# Altium PCB Remote Rev B3.PcbDoc
Units mm, origin at the board's own origin, x right, y up, seen from the top; angles counter-clockwise.
Board outline 82 x 75.85 mm, 4 copper layers (SIG/PWR1, GND1, GND2, SIG/PWR2), stack 0.727 mm thick; 95 components, 39 nets, 247 pads, 48 vias.
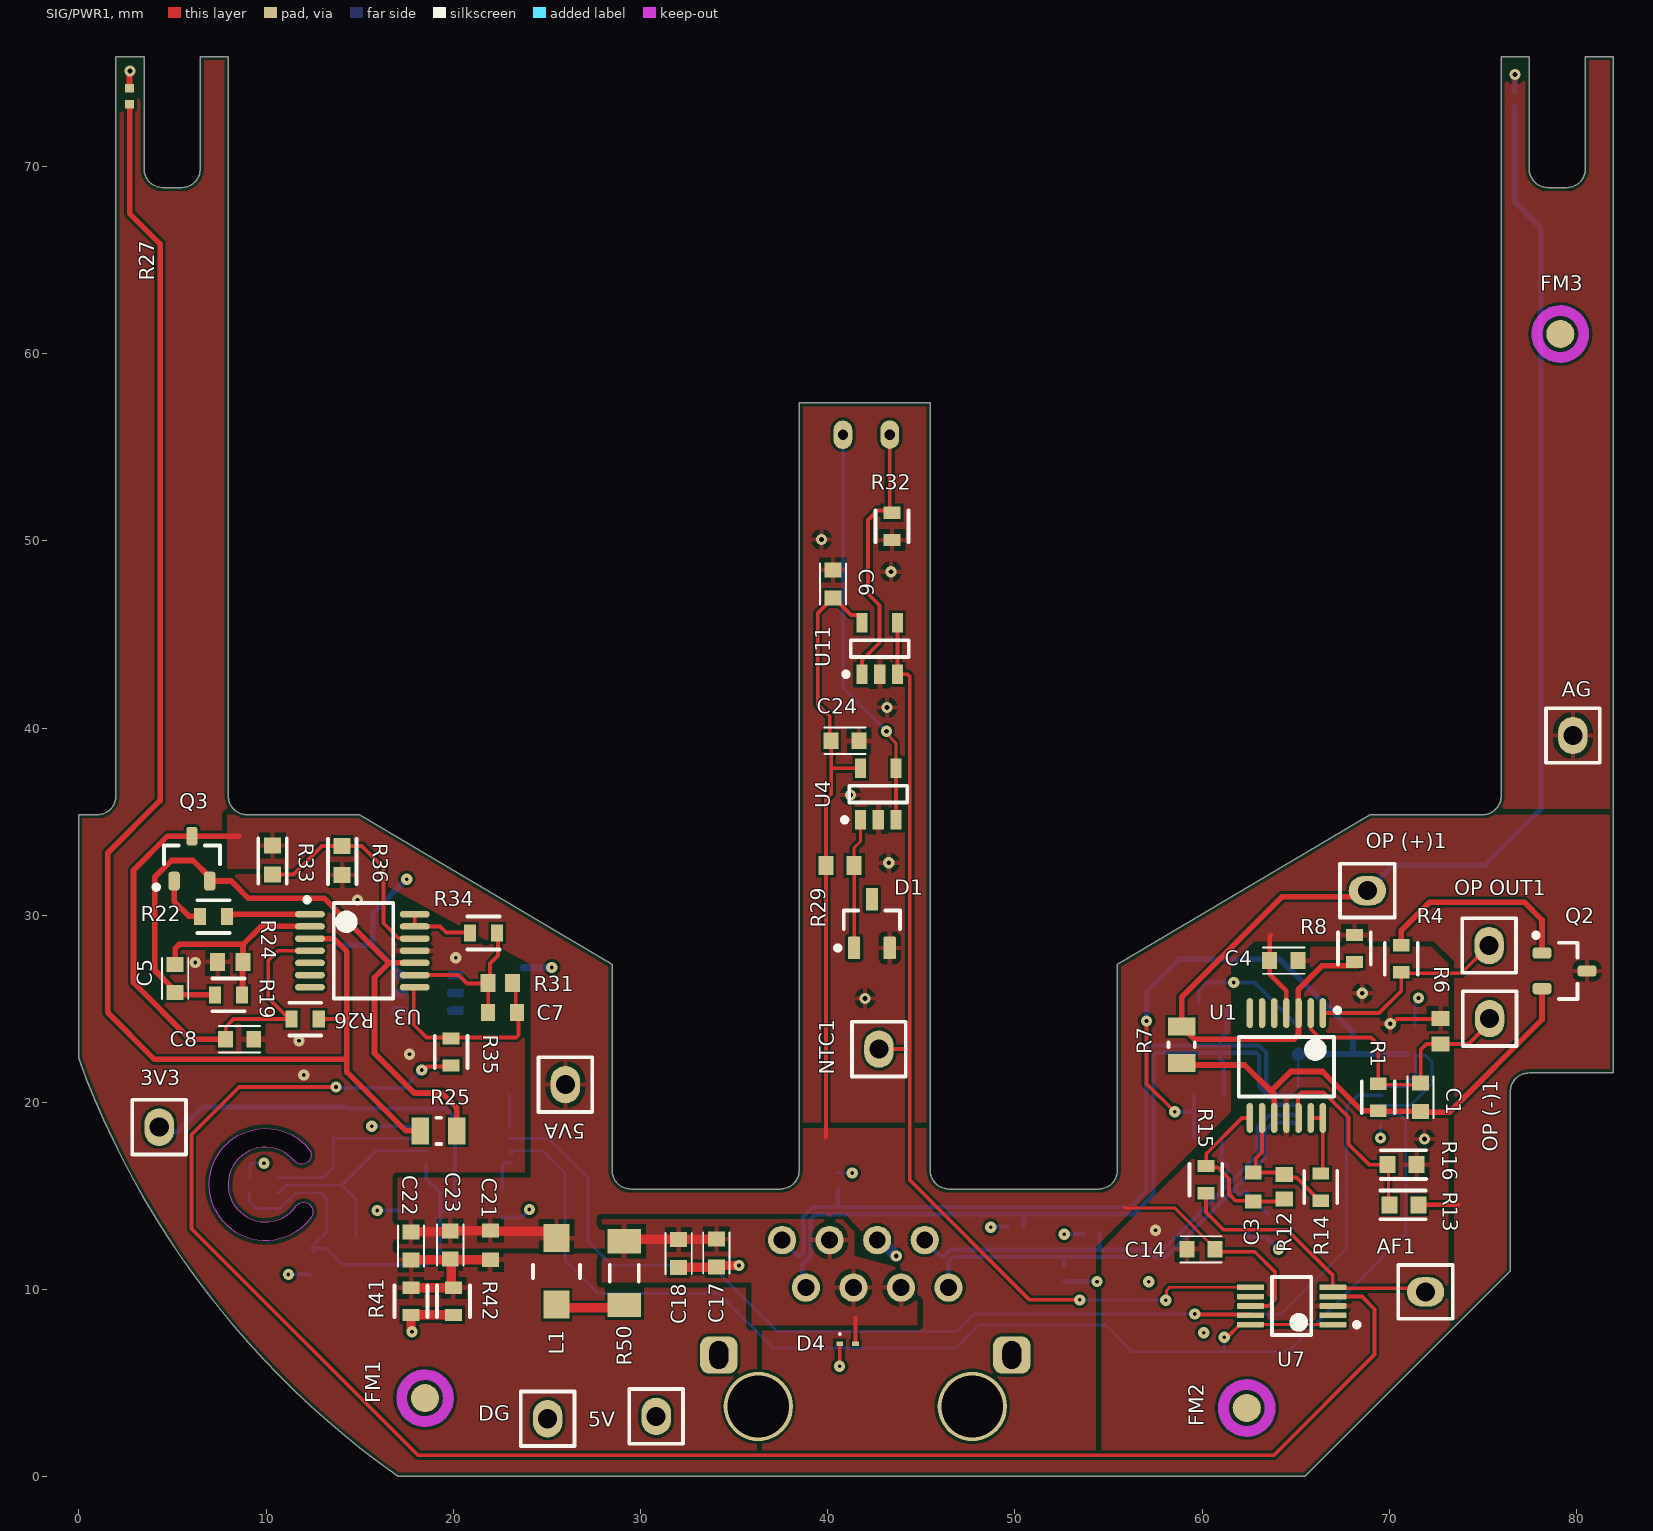
[diagram p0: SIG/PWR1 view]
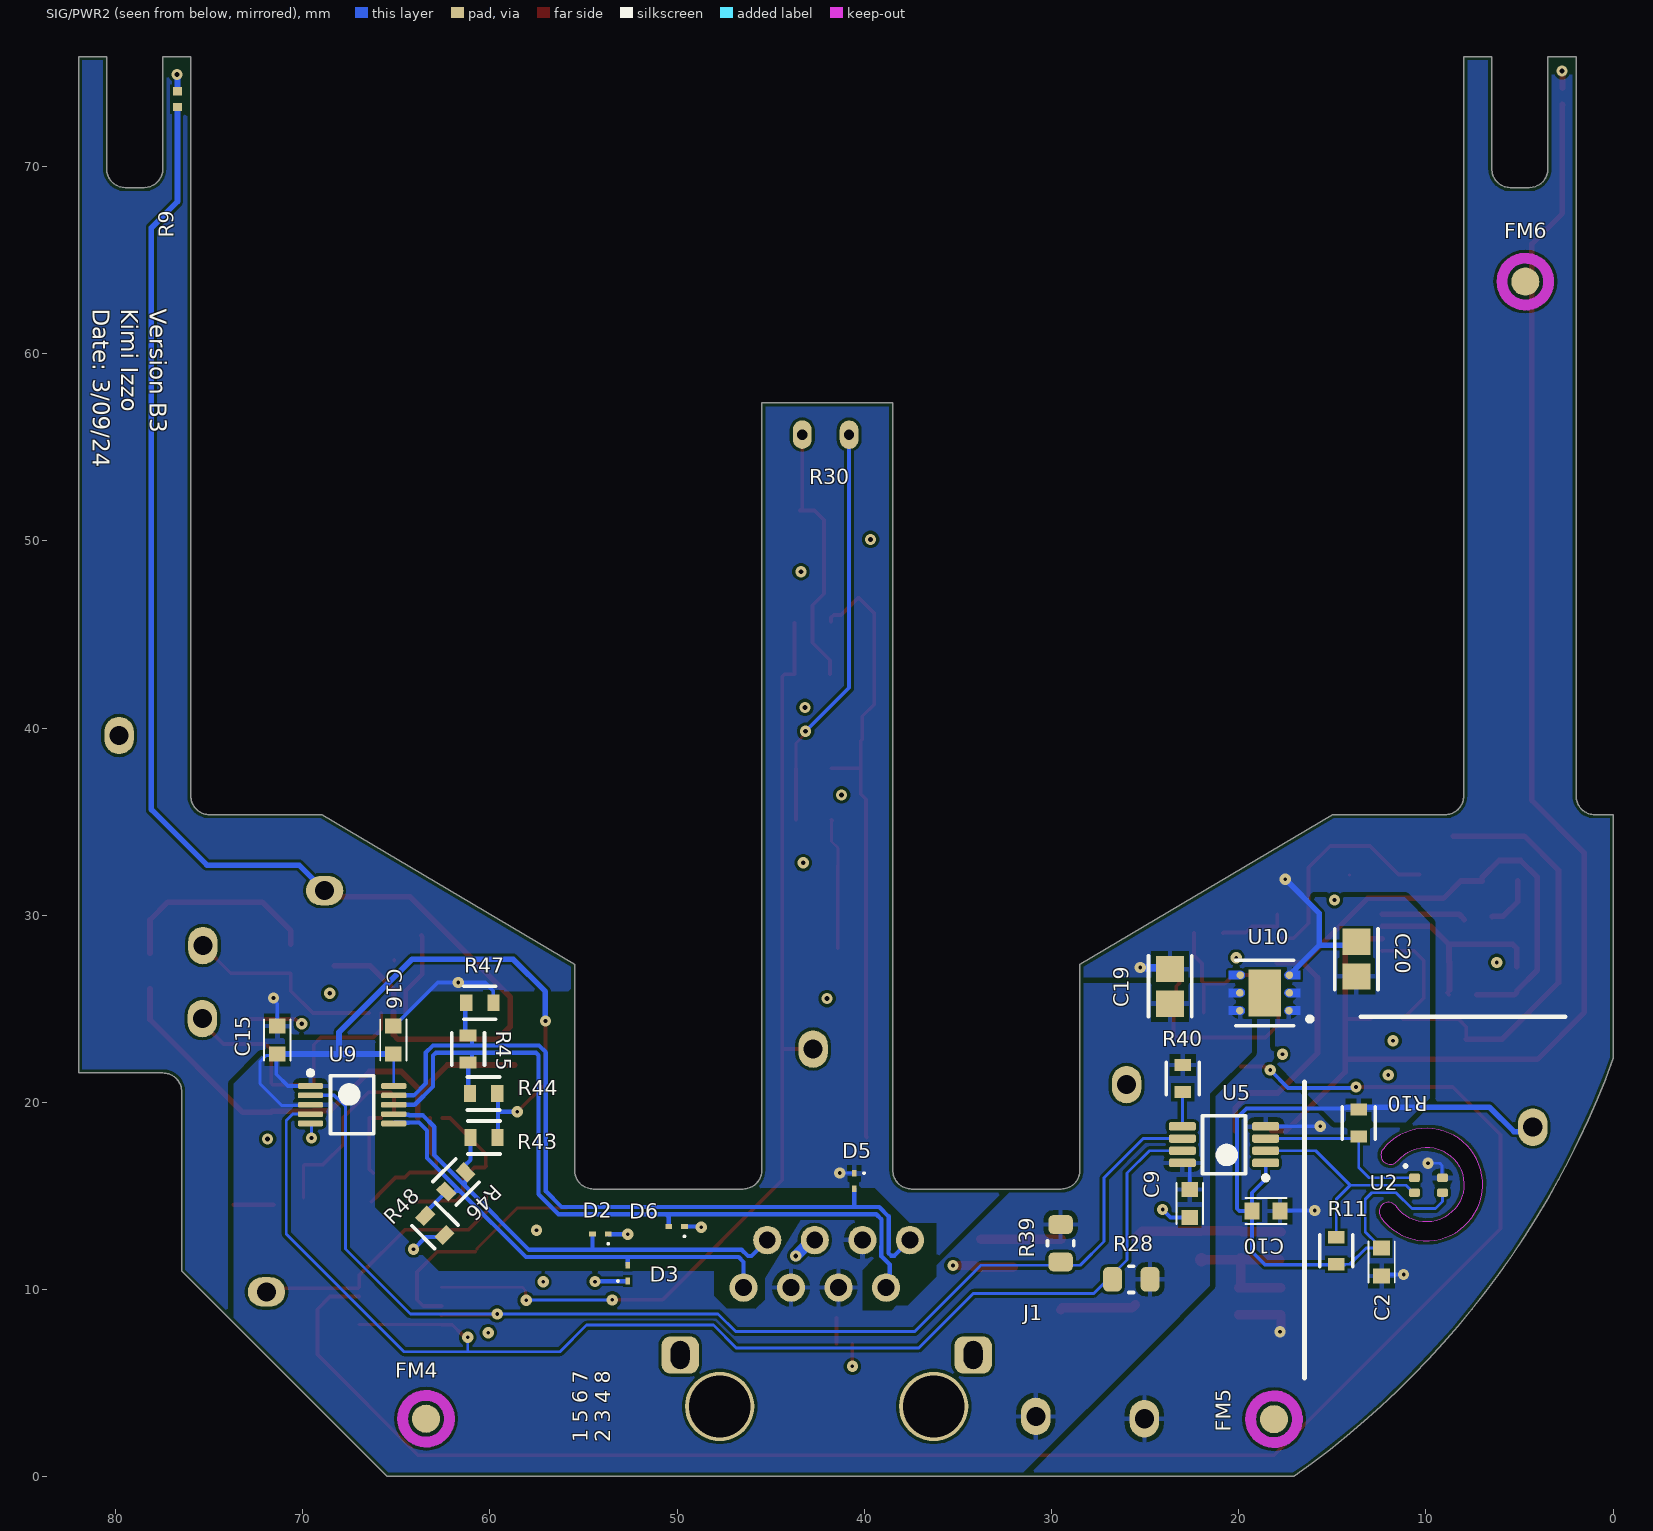
[diagram p1: SIG/PWR2 view, seen from below]
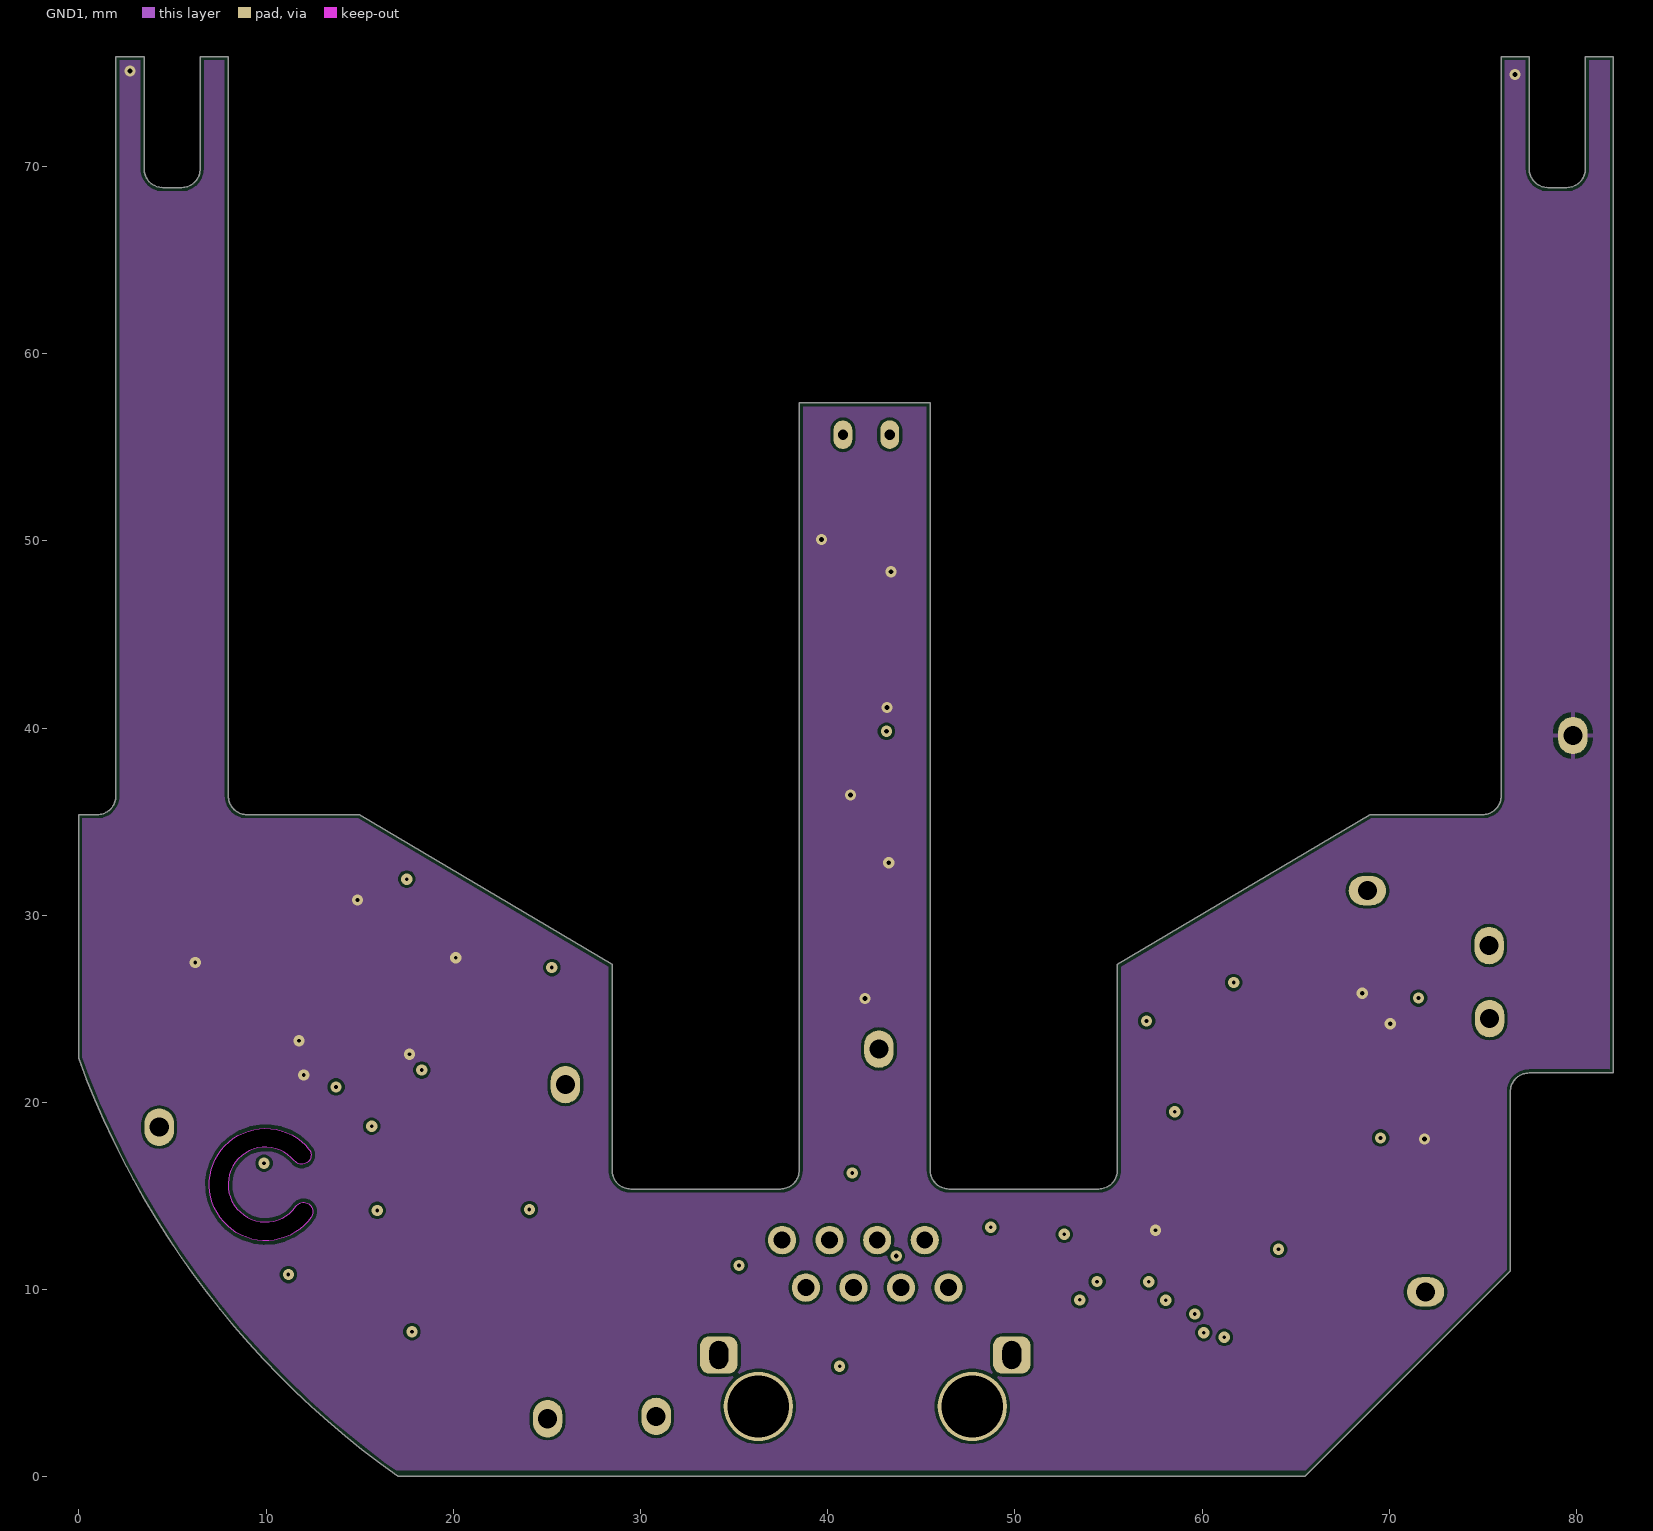
[diagram p2: GND1]
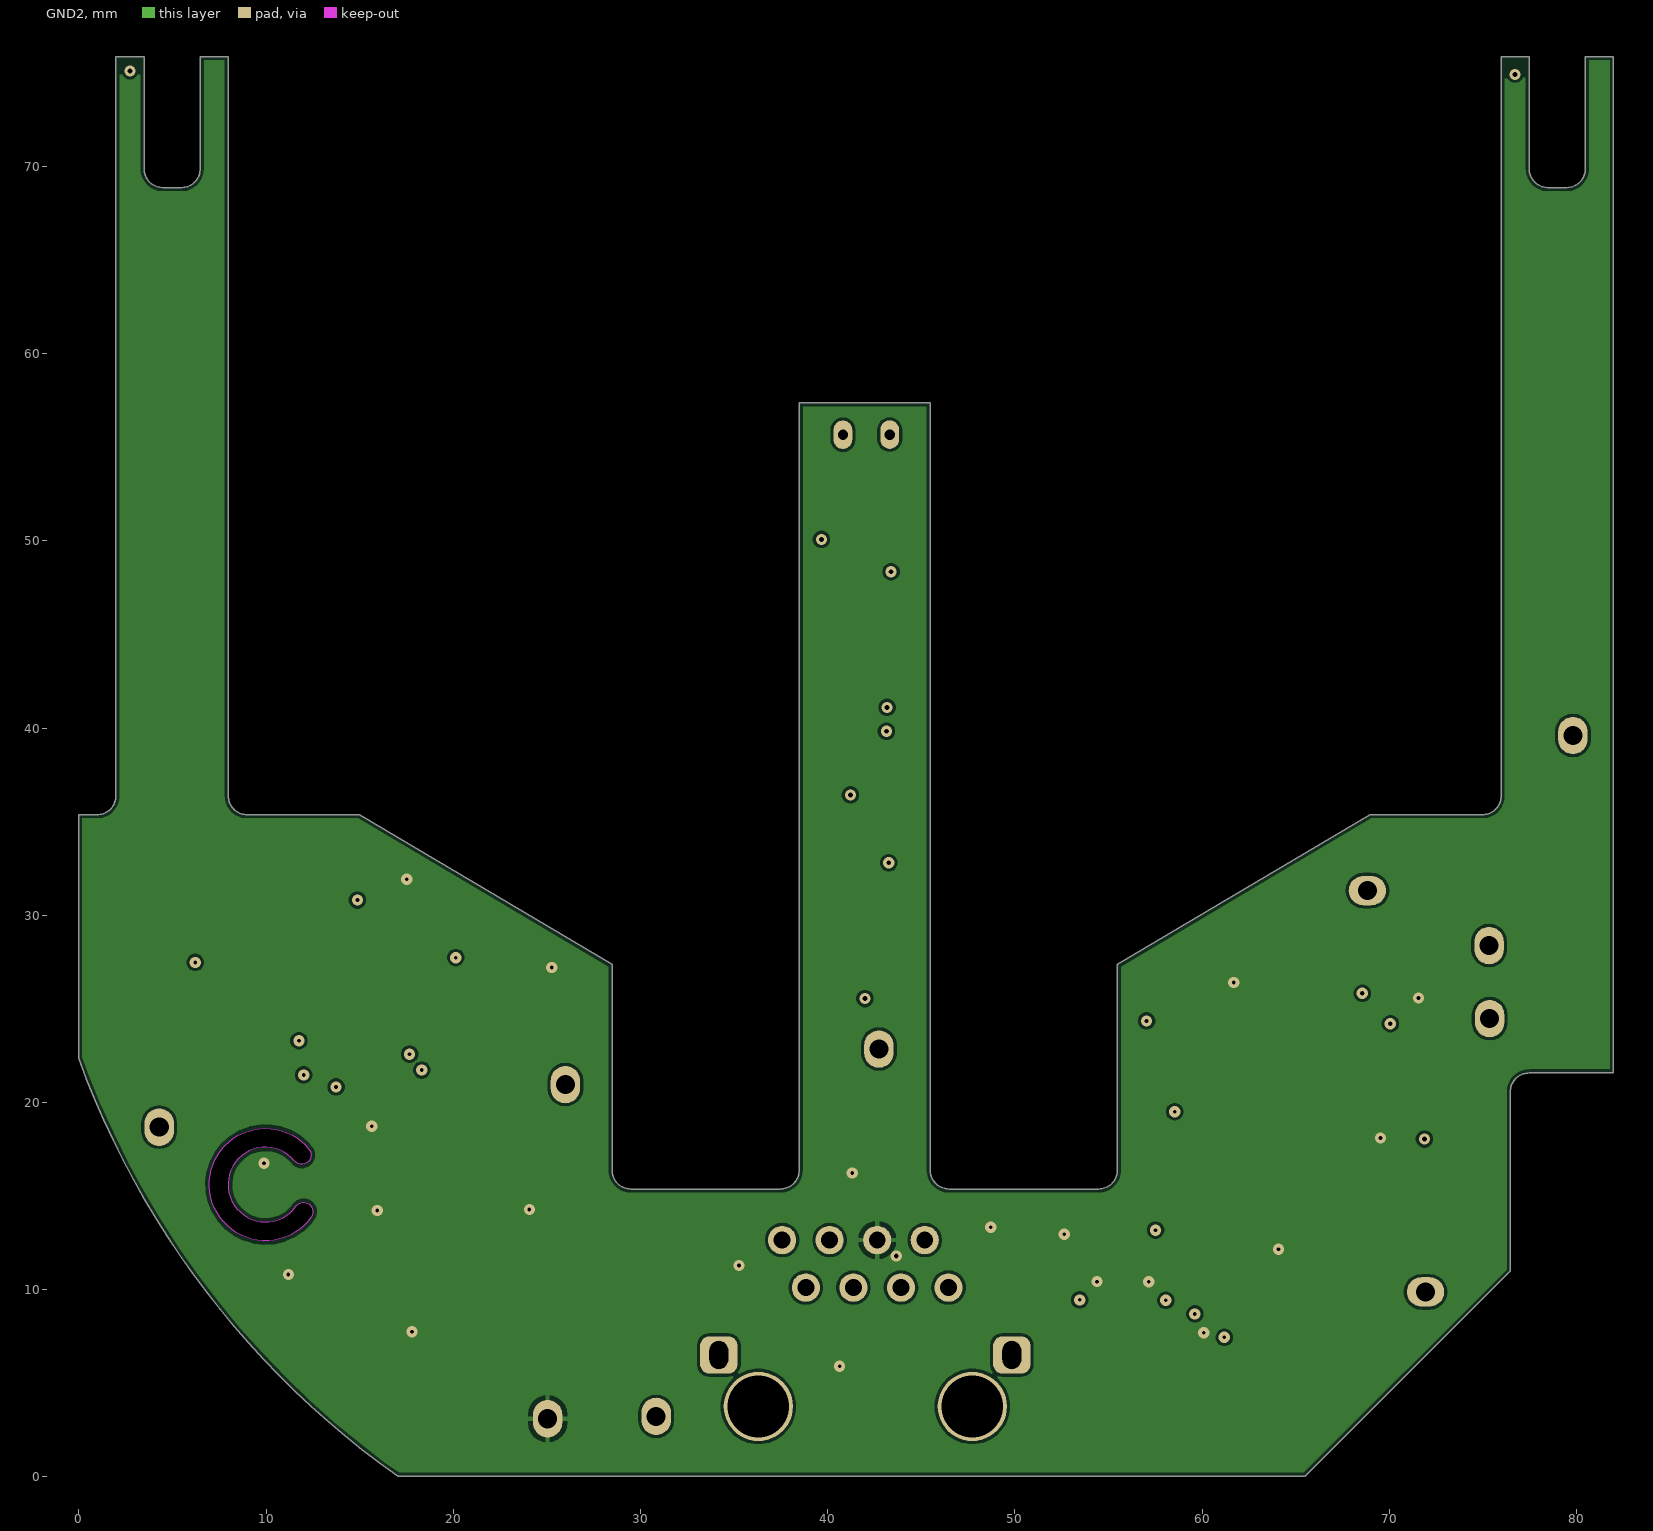
[diagram p3: GND2]
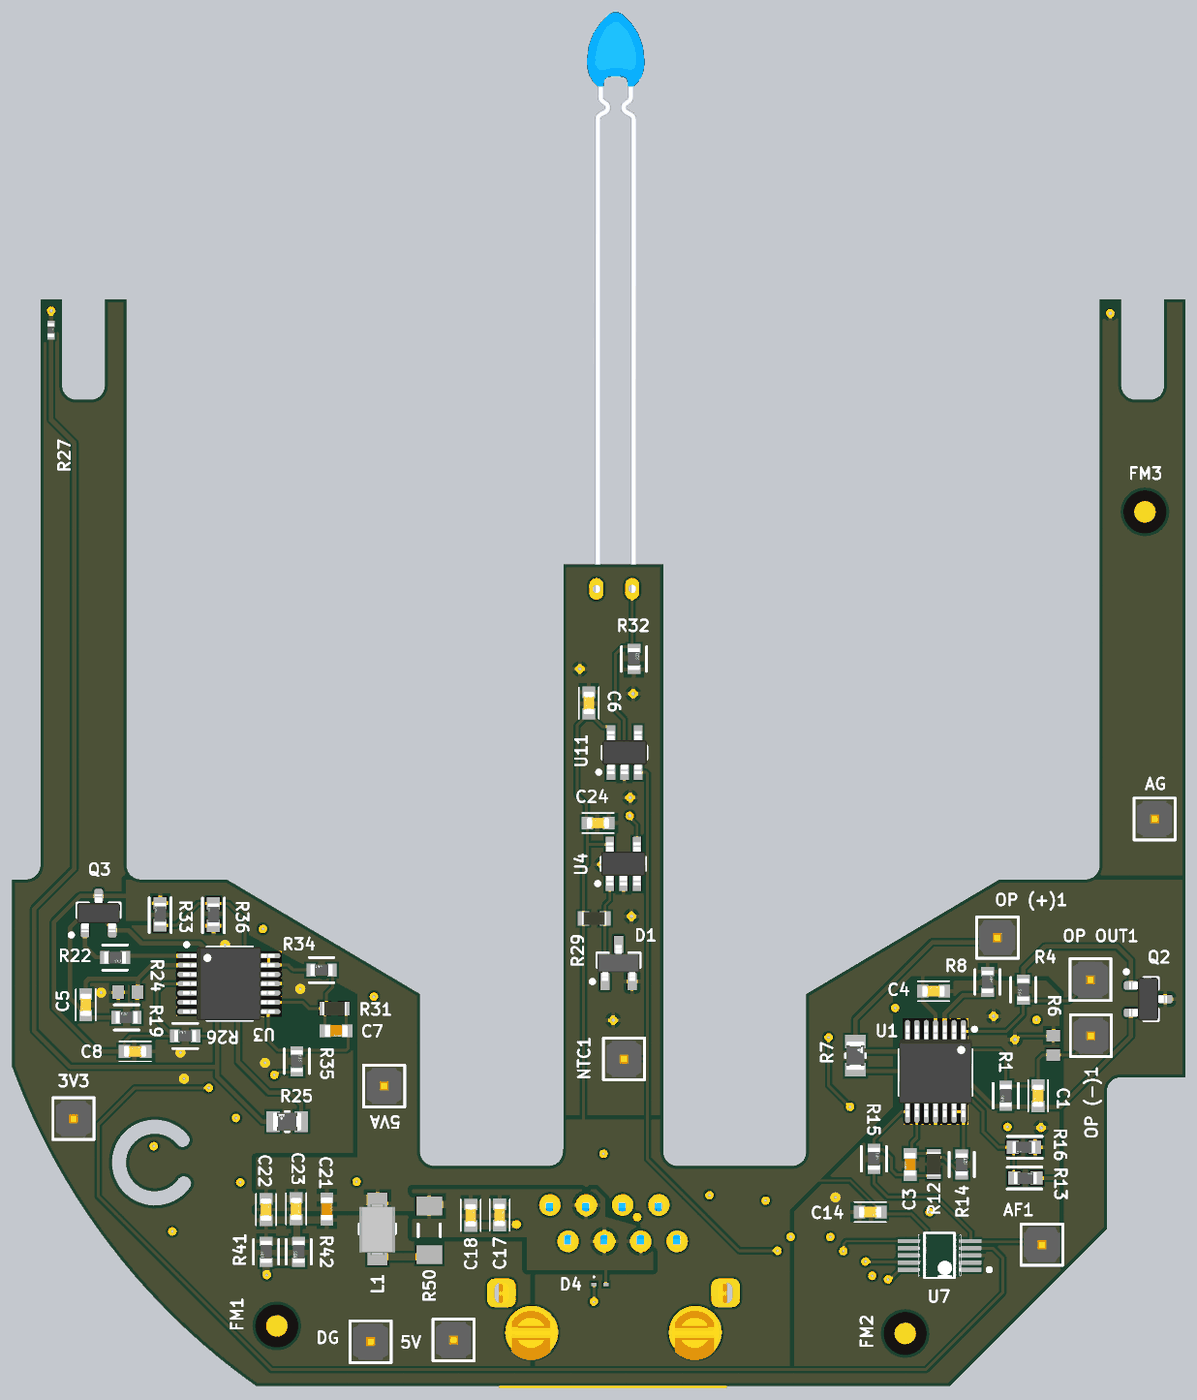
[diagram p4: 3D render of the assembled board from above, using the file's embedded part models]
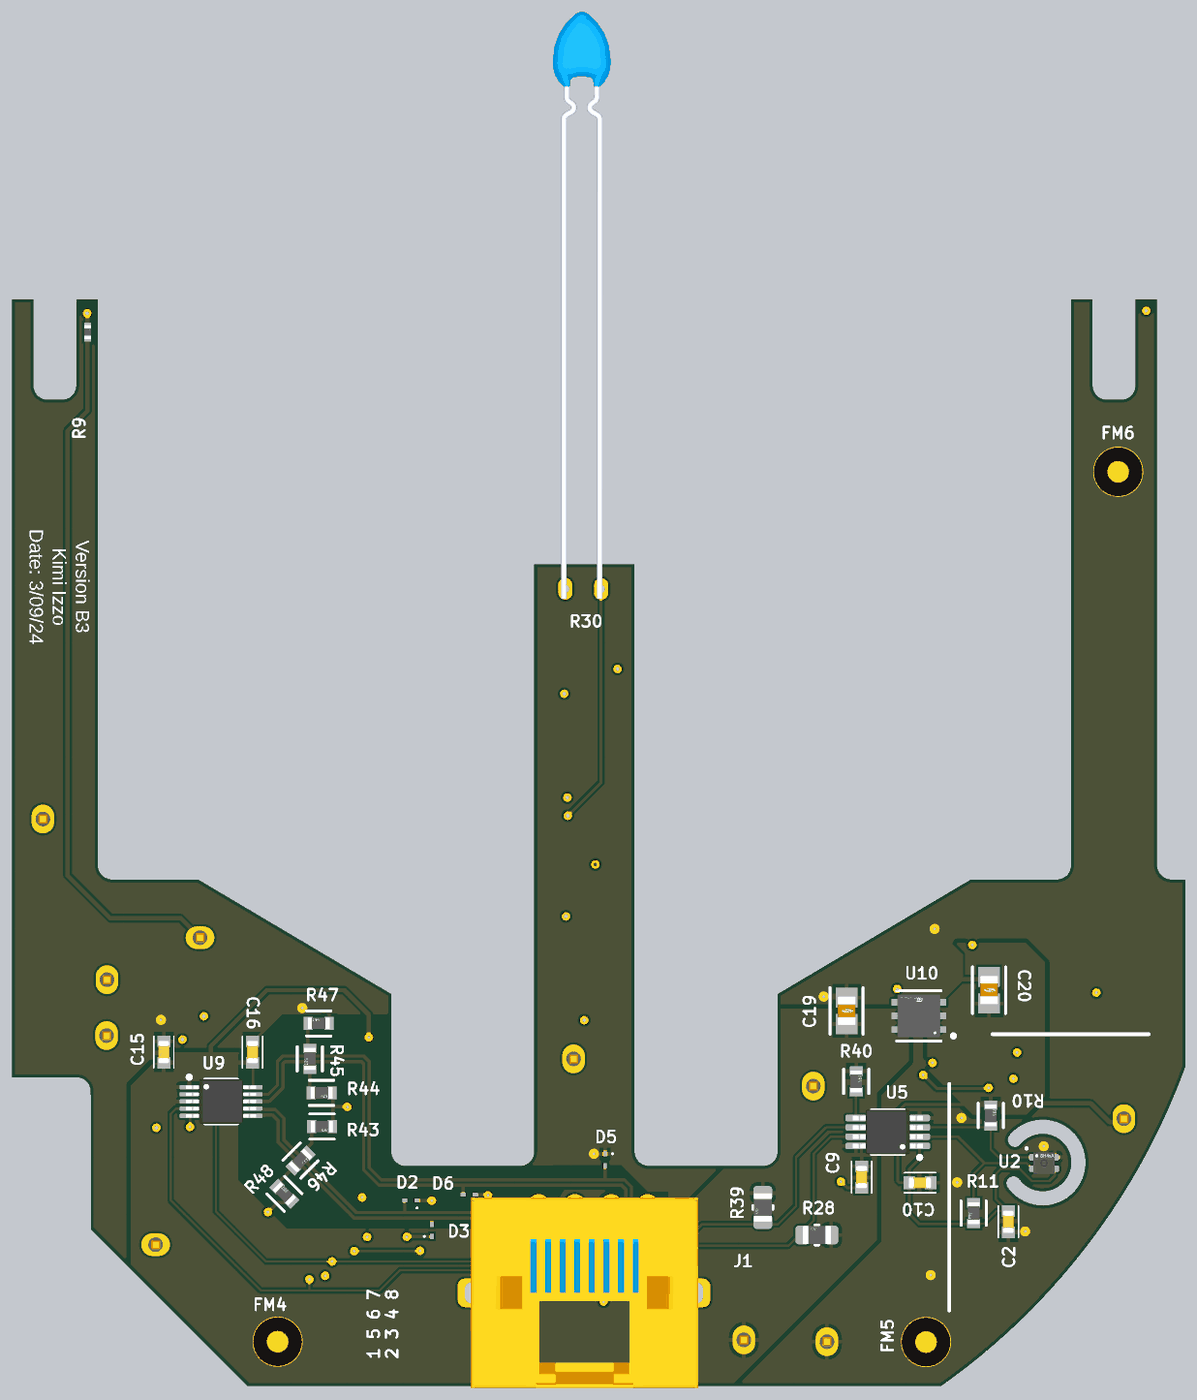
[diagram p5: 3D render of the assembled board from below, using the file's embedded part models]

## Layer stack, top to bottom
Top Solder: solder mask 0.0175, Solder Resist, Dk 3.5
SIG/PWR1: signal copper 0.0175
Dielectric 2: prepreg 0.196, PP-006, Dk 4.56
GND1: signal copper 0.035
Dielectric 1: dielectric 0.23, FR-4, Dk 4.6
GND2: signal copper 0.035
Dielectric 3: prepreg 0.196, PP-006, Dk 4.56
SIG/PWR2: signal copper 0.0175
Bottom Solder: solder mask 0.0175, Solder Resist, Dk 3.5

## Board outline
-0.024,22.379 ccw(c44.154,38.419) 17.036,0.032 65.504,0.032 76.466,10.994 76.466,20.579 cw(c77.466,20.579) 77.466,21.579 81.976,21.579 81.976,75.879 80.476,75.879 80.476,69.879 cw(c79.476,69.879) 79.476,68.879 78.476,68.879 cw(c78.476,69.879) 77.476,69.879 77.476,75.879 75.976,75.879 75.976,36.379 cw(c74.976,36.379) 74.976,35.379 68.976,35.379 55.476,27.379 55.476,16.379 cw(c54.476,16.379) 54.476,15.379 46.476,15.379 cw(c46.476,16.379) 45.476,16.379 45.476,57.379 38.476,57.379 38.476,16.379 cw(c37.476,16.379) 37.476,15.379 29.476,15.379 cw(c29.476,16.379) 28.476,16.379 28.476,27.379 14.976,35.379 8.976,35.379 cw(c8.976,36.379) 7.976,36.379 7.976,75.879 6.476,75.879 6.476,69.879 cw(c5.476,69.879) 5.476,68.879 4.476,68.879 cw(c4.476,69.879) 3.476,69.879 3.476,75.879 1.976,75.879 1.976,36.379 cw(c0.976,36.379) 0.976,35.379 -0.024,35.379
cut-out: 12.404,13.87 cw(c9.965,15.617) 12.288,17.516 cw(c11.901,17.2) 12.401,17.2 cw(c11.901,17.2) 11.513,16.883 ccw(c9.965,15.617) 11.591,14.453 cw(c11.997,14.162) 12.498,14.162 cw(c11.997,14.162)

## Design rules (kind name [scope] priority, off if disabled: settings)
BoardOutlineClearance [All] p1: gap=0.2 ignorepadtopadclearanceinfootprint=FALSE
Clearance [All] p1: gap=0.154 ignorepadtopadclearanceinfootprint=TRUE except(0.3: Poly-Poly)
ComponentClearance [All] p1: gap=0.102 collisioncheckmode=3 verticalgap=0.102 showdistances=TRUE
DiffPairsRouting "DiffPairsRouting sda" [InDifferentialPair('SDA')] p1: maxlimit=0.154 minlimit=0.127 mostfreqgap=0.16 toplayer_mingap=0.154 toplayer_minwidth=0.228 toplayer_maxwidth=0.228 toplayer_prefwidth=0.232 midlayer1_maxgap=0.127 midlayer1_prefgap=0.127 midlayer1_minwidth=0.064 midlayer1_maxwidth=0.064 midlayer1_prefwidth=0.059 midlayer2_maxgap=0.127 midlayer2_prefgap=0.127 midlayer2_minwidth=0.064 midlayer2_maxwidth=0.064 midlayer2_prefwidth=0.059 bottomlayer_mingap=0.154 bottomlayer_minwidth=0.228 bottomlayer_maxwidth=0.228 bottomlayer_prefwidth=0.232 impedanceprofiledriven=TRUE impedanceprofileid={54CBF0A0-3E90-4324-8A0D-8C87282BD158} impedanceprofilevalue=100.000000 maxuncoupledlength=12.7
DiffPairsRouting "DiffPairsRouting scl" [InDifferentialPair('SCL')] p2: maxlimit=0.154 minlimit=0.127 mostfreqgap=0.16 toplayer_mingap=0.154 toplayer_minwidth=0.228 toplayer_maxwidth=0.228 toplayer_prefwidth=0.232 midlayer1_maxgap=0.127 midlayer1_prefgap=0.127 midlayer1_minwidth=0.064 midlayer1_maxwidth=0.064 midlayer1_prefwidth=0.059 midlayer2_maxgap=0.127 midlayer2_prefgap=0.127 midlayer2_minwidth=0.064 midlayer2_maxwidth=0.064 midlayer2_prefwidth=0.059 bottomlayer_mingap=0.154 bottomlayer_minwidth=0.228 bottomlayer_maxwidth=0.228 bottomlayer_prefwidth=0.232 impedanceprofiledriven=TRUE impedanceprofileid={54CBF0A0-3E90-4324-8A0D-8C87282BD158} impedanceprofilevalue=100.000000 maxuncoupledlength=12.7
Height [All] p1: minheight=0 maxheight=1816.048 prefheight=12.7
HoleSize [All] p1: absolutevalues=TRUE maxlimit=6.3 minlimit=0.2 maxpercent=80.000 minpercent=20.000
HoleToHoleClearance [All] p1: gap=0.254 allowstackedmicrovias=FALSE
MinimumAnnularRing [All] p1: minimumring=0.152
MinimumSolderMaskSliver [All] p1: minsoldermaskwidth=0.152
PlaneClearance [All] p1: clearance=0.102
PlaneConnect PlaneConnectPowerPads [InPadClass('PowerPads')] p1: planeconnectstyle=Direct reliefexpansion=0.508 reliefentries=4 reliefconductorwidth=0.254 reliefairgap=0.254
PlaneConnect [All] p2: pad.planeconnectstyle=Relief pad.reliefexpansion=0.3 pad.reliefentries=4 pad.reliefconductorwidth=0.102 pad.reliefairgap=0.102 via.planeconnectstyle=Direct via.reliefexpansion=0.3 via.reliefentries=4 via.reliefconductorwidth=0.127 via.reliefairgap=0.127
PolygonConnect "dg polygon connect" [InNet('DGND')] p1: thpad.connectstyle=Relief thpad.reliefconductorwidth=0.254 thpad.reliefentries=4 thpad.polygonreliefangle="90 Angle" thpad.airgapwidth=0.254 smdpad.connectstyle=Relief smdpad.reliefconductorwidth=0.254 smdpad.reliefentries=4 smdpad.polygonreliefangle="90 Angle" smdpad.airgapwidth=0.254 via.connectstyle=Direct via.reliefconductorwidth=0.254 via.reliefentries=4 via.polygonreliefangle="90 Angle" via.airgapwidth=0.254
PolygonConnect "Ag polygon connect_1" [InNet('AGND')] p2: thpad.connectstyle=Relief thpad.reliefconductorwidth=0.254 thpad.reliefentries=4 thpad.polygonreliefangle="90 Angle" thpad.airgapwidth=0.254 smdpad.connectstyle=Relief smdpad.reliefconductorwidth=0.254 smdpad.reliefentries=4 smdpad.polygonreliefangle="90 Angle" smdpad.airgapwidth=0.254 via.connectstyle=Direct via.reliefconductorwidth=0.254 via.reliefentries=4 via.polygonreliefangle="90 Angle" via.airgapwidth=0.254
PolygonConnect "A5V polygon connect_1" [InNet('+5V_ANLG')] p3: thpad.connectstyle=Relief thpad.reliefconductorwidth=0.254 thpad.reliefentries=4 thpad.polygonreliefangle="90 Angle" thpad.airgapwidth=0.254 smdpad.connectstyle=Relief smdpad.reliefconductorwidth=0.254 smdpad.reliefentries=4 smdpad.polygonreliefangle="90 Angle" smdpad.airgapwidth=0.254 via.connectstyle=Direct via.reliefconductorwidth=0.254 via.reliefentries=4 via.polygonreliefangle="90 Angle" via.airgapwidth=0.254
PolygonConnect "3V polygon connect_1" [InNet('+3V3')] p4: thpad.connectstyle=Relief thpad.reliefconductorwidth=0.254 thpad.reliefentries=4 thpad.polygonreliefangle="90 Angle" thpad.airgapwidth=0.254 smdpad.connectstyle=Relief smdpad.reliefconductorwidth=0.254 smdpad.reliefentries=4 smdpad.polygonreliefangle="90 Angle" smdpad.airgapwidth=0.254 via.connectstyle=Direct via.reliefconductorwidth=0.254 via.reliefentries=4 via.polygonreliefangle="90 Angle" via.airgapwidth=0.254
PolygonConnect "5V polygon connect_1" [InNet('+5V')] p5: thpad.connectstyle=Relief thpad.reliefconductorwidth=0.254 thpad.reliefentries=4 thpad.polygonreliefangle="90 Angle" thpad.airgapwidth=0.254 smdpad.connectstyle=Relief smdpad.reliefconductorwidth=0.254 smdpad.reliefentries=4 smdpad.polygonreliefangle="90 Angle" smdpad.airgapwidth=0.254 via.connectstyle=Direct via.reliefconductorwidth=0.254 via.reliefentries=4 via.polygonreliefangle="90 Angle" via.airgapwidth=0.254
RoutingVias [All] p1: holewidth=0.2 width=0.6 viastyle="Through Hole" minholewidth=0.2 minwidth=0.6 maxholewidth=6.3 maxwidth=6.55
SilkToSilkClearance [All] p1: silktosilkclearance=0.127
SilkToSolderMaskClearance [IsPad] p1: minsilkscreentomaskgap=0.127 clearancetoexposedcopper=TRUE
SolderMaskExpansion [All] p1: expansion=0.051 istentingtop=FALSE
UnRoutedNet [All] p1: checkbadconnections=TRUE
Width Width_6mil [All] p1: maxlimit=0.7 minlimit=0.153 preferedwidth=0.2
Width Power_20mil [All] p2: maxlimit=25.4 minlimit=0.508 preferedwidth=0.508 minimp=50.000000 maximp=50.000000 favimp=50.000000
Width Power_12mil [All] p3: maxlimit=25.4 minlimit=0.305 preferedwidth=0.305 minimp=50.000000 maximp=50.000000 favimp=50.000000
Width Width_10mil [All] p4: maxlimit=25.4 minlimit=0.254 preferedwidth=0.254 minimp=50.000000 maximp=50.000000 favimp=50.000000
Width Width_4mil [All] p5: maxlimit=25.4 minlimit=0.102 preferedwidth=0.102 minimp=50.000000 maximp=50.000000 favimp=50.000000
19 further rules are at their usual default settings.

## Classes and differential pairs
component class Airspeed1_B3: AF1 C1 C2 C3 C4 "OP (+)1" "OP (-)1" "OP OUT1" Q2 R1 R4 R6 R7 R8 R9 R10 R11 R12 R13 R14 R15 R16 U1 U2
component class "Bus Management_B3": 3V3 5V 5VA AG C9 C10 C14 C15 C16 C17 C18 C19 C20 C21 C22 C23 D2 D3 D4 D5 D6 DG FM1 FM2 FM3 FM4 FM5 FM6 J1 L1 R28 R39 R40 R41 R42 R43 R44 R45 R46 R47 R48 R50 R51 U5 U7 U9 U10
component class Airspeed2_B3: C5 C6 C7 C8 C24 D1 NTC1 Q3 R19 R22 R24 R25 R26 R27 R29 R30 R31 R32 R33 R34 R35 R36 U3 U4 U11
differential pair SDA: +SDA_P -SDA_N
differential pair SCL: +SCL_P -SCL_N

## Components (designator, comment, footprint, x,y, rotation, side; value= is the part's Value field where it differs from the comment)
3V3 "PH1-01-UA" FP-PH1-01-UA-MFG 4.286,18.682 r90 top
5V "PH1-01-UA" FP-PH1-01-UA-MFG 30.836,3.232 r90 top
5VA "PH1-01-UA" FP-PH1-01-UA-MFG 25.986,20.957 r270 top
AF1 "PH1-01-UA" FP-PH1-01-UA-MFG 71.936,9.882 r0 top
AG "PH1-01-UA" FP-PH1-01-UA-MFG 79.811,39.607 r90 top
C1 "CL10B105KA8NFNC" MANUF_CAP_0603 71.667,20.282 r270 top value=1µF
C2 "CC0603KRX7R7BB104" MANUF_CAP_0603 12.361,11.482 r90 bottom value=100nF
C3 "GRM188R61A106ME69D" FP-GRM188-0_15-MFG 62.736,15.482 r270 top value=10µF
C4 "CC0603KRX7R7BB104" MANUF_CAP_0603 64.361,27.582 r180 top value=100nF
C5 "CL10B105KA8NFNC" MANUF_CAP_0603 5.136,26.632 r270 top value=1µF
C6 "CC0603KRX7R7BB104" MANUF_CAP_0603 40.286,47.707 r270 top value=100nF
C7 "GRM188R61A106ME69D" FP-GRM188-0_15-MFG 22.636,24.807 r0 top value=10µF
C8 "CC0603KRX7R7BB104" MANUF_CAP_0603 8.586,23.382 r180 top value=100nF
C9 "CC0603KRX7R7BB104" MANUF_CAP_0603 22.611,14.607 r90 bottom value=100nF
C10 "CC0603KRX7R7BB104" MANUF_CAP_0603 18.536,14.207 r0 bottom value=100nF
C14 "CC0603KRX7R7BB104" MANUF_CAP_0603 59.94,12.159 r0 top value=100nF
C15 "CC0603KRX7R7BB104" MANUF_CAP_0603 71.361,23.332 r270 bottom value=100nF
C16 "CC0603KRX7R7BB104" MANUF_CAP_0603 65.161,23.332 r270 bottom value=100nF
C17 "CL10B105KA8NFNC" MANUF_CAP_0603 34.051,11.953 r90 top value=1µF
C18 "CC0603KRX7R7BB104" MANUF_CAP_0603 32.036,11.932 r90 top value=100nF
C19 "CL21B106KOQNNNE" FP-CL21B106KOQNNNE-IPC_A 23.661,26.207 r270 bottom value=10µF
C20 "CL21B106KOQNNNE" FP-CL21B106KOQNNNE-IPC_A 13.711,27.655 r270 bottom value=10µF
C21 "GRM188R61A106ME69D" FP-GRM188-0_15-MFG 21.977,12.376 r90 top value=10µF
C22 "CL10B105KA8NFNC" MANUF_CAP_0603 17.733,12.332 r90 top value=1µF
C23 "CC0603KRX7R7BB104" MANUF_CAP_0603 19.836,12.382 r90 top value=100nF
C24 "CC0603KRX7R7BB104" MANUF_CAP_0603 40.927,39.326 r180 top value=100nF
D1 "LM4040C41IDBZR" DBZ0003A_M 42.361,29.557 r90 top
D2 "ESD9B5.0ST5G" ONSC-SOD-923-2-514AB-01_V 54.102,12.976 r0 bottom
D3 "ESD9B5.0ST5G" ONSC-SOD-923-2-514AB-01_V 52.636,10.882 r90 bottom
D4 "ESD9B5.0ST5G" ONSC-SOD-923-2-514AB-01_V 41.061,7.107 r0 top
D5 "ESD9B5.0ST5G" ONSC-SOD-923-2-514AB-01_V 40.536,15.807 r270 bottom
D6 "ESD9B5.0ST5G" ONSC-SOD-923-2-514AB-01_V 50.027,13.376 r0 bottom
DG "PH1-01-UA" FP-PH1-01-UA-MFG 25.036,3.107 r270 top
FM1 "fiducial 1mm" "fiducial 1mm-Footprint-1"#1 18.486,4.207 r0 top
FM2 "fiducial 1mm" "fiducial 1mm-Footprint-1"#1 62.386,3.682 r0 top
FM3 "fiducial 1mm" "fiducial 1mm-Footprint-1"#1 79.136,61.057 r0 top
FM4 "fiducial 1mm" "fiducial 1mm-Footprint-1"#2 63.411,3.107 r180 bottom
FM5 "fiducial 1mm" "fiducial 1mm-Footprint-1"#2 18.111,3.082 r180 bottom
FM6 "fiducial 1mm" "fiducial 1mm-Footprint-1"#2 4.686,63.857 r180 bottom
J1 "09455511103" 09455511103-Footprint-1 45.183,12.653 r180 bottom locked
L1 "CC322522A-2R2K" INDC3225X06N 25.511,10.982 r90 top value=2.2uH
NTC1 "PH1-01-UA" FP-PH1-01-UA-MFG 42.736,22.857 r90 top
"OP (+)1" "PH1-01-UA" FP-PH1-01-UA-MFG 68.833,31.32 r0 top
"OP (-)1" "PH1-01-UA" FP-PH1-01-UA-MFG 75.361,24.482 r90 top
"OP OUT1" "PH1-01-UA" FP-PH1-01-UA-MFG 75.331,28.387 r90 top
Q2 "FMMT493TA" SOT95P237X110-3N 79.361,27.032 r0 top
Q3 "FMMT493TA" SOT95P237X110-3N 6.036,33.032 r90 top
R1 "ERJ-3EKF2001V" MANUF_RES_0603 69.411,20.282 r270 top value=2k
R4 "ERJ-3EKF2001V" MANUF_RES_0603 70.636,27.68 r270 top value=2k
R6 "ERJ-3EKF1653V" RESC1608X55X30NL15T15 72.736,23.807 r270 top value=165k
R7 "CRCW08051R00FKEAHP" Vishay_CRCW0805-HPe3_MFG 58.911,23.082 r270 top value=1R
R8 "RC0603FR-0710KL" MANUF_RES_0603 68.136,28.232 r90 top value=10k
R9 "NTCG103NH471JT1" NTCG103NH471JT1-Footprint-1 76.686,73.607 r90 bottom value=470
R10 "RC0603FR-0710KL" MANUF_RES_0603 13.586,18.907 r90 bottom value=10k
R11 "RC0603FR-0710KL" MANUF_RES_0603 14.786,12.082 r270 bottom value=10k
R12 "CRCW06033K60FKEAC" RESC1609X50X30NL08T20 64.386,15.507 r270 top value=3.6k
R13 "AC0603FR-0775KL" "IPC B 0603 RES" 70.786,14.532 r0 top value=75k
R14 "ERJ-3EKF2001V" MANUF_RES_0603 66.336,15.482 r90 top value=2k
R15 "ERJ-3EKF2001V" MANUF_RES_0603 60.202,15.876 r90 top value=2k
R16 "RC0603FR-07280KL" "IPC B 0603 RES" 70.686,16.682 r180 top value=280k
R19 "ERJ-3EKF2001V" MANUF_RES_0603 7.99,25.75 r180 top value=2k
R22 "ERJ-3EKF2001V" MANUF_RES_0603 7.186,29.932 r0 top value=2k
R24 "ERJ-3EKF1653V" RESC1608X55X30NL15T15 8.086,27.507 r0 top value=165k
R25 "CRCW08051R00FKEAHP" Vishay_CRCW0805-HPe3_MFG 19.211,18.482 r0 top value=1R
R26 "RC0603FR-0710KL" MANUF_RES_0603 12.086,24.457 r180 top value=10k
R27 "NTCG103NH471JT1" NTCG103NH471JT1-Footprint-1 2.702,73.751 r90 top value=470
R28 "RC0805JR-075K1L" 0805 25.736,10.557 r180 bottom value=5.1k
R29 "Resistor 1k +/-1% 0603 100 mW" RESC1608X55X25ML10T15 40.661,32.657 r180 top value=1k
R30 "TT7-10KC3-11" TT7-10KC3-11-Footprint-1 42.061,55.682 r180 bottom value=10k
R31 "CRCW06033K60FKEAC" RESC1609X50X30NL08T20 22.511,26.382 r0 top value=3.6k
R32 "RC0603FR-0710KL" MANUF_RES_0603 43.436,50.782 r90 top value=10k
R33 "AC0603FR-0775KL" "IPC B 0603 RES" 10.336,32.958 r90 top value=75k
R34 "ERJ-3EKF2001V" MANUF_RES_0603 21.611,29.057 r180 top value=2k
R35 "ERJ-3EKF2001V" MANUF_RES_0603 19.88,22.697 r90 top value=2k
R36 "RC0603FR-07280KL" "IPC B 0603 RES" 14.061,32.932 r90 top value=280k
R39 "RC0805JR-075K1L" 0805 29.511,12.482 r90 bottom value=5.1k
R40 "RC0603FR-0710KL" MANUF_RES_0603 22.986,21.282 r90 bottom value=10k
R41 "Resistor 0R +/- 5% 0603 100 mW" MANUF_RES_0603 17.736,9.382 r270 top value=0
R42 "Resistor 0R +/- 5% 0603 100 mW" MANUF_RES_0603 20.011,9.382 r270 top value=0
R43 "ERJ-3EKF5900V" MANUF_RES_0603 60.311,18.132 r180 bottom value=590
R44 "ERJ-3EKF5900V" MANUF_RES_0603 60.336,20.482 r180 bottom value=590
R45 "RMCF0603FT110R" MANUF_RES_0603 61.161,22.857 r270 bottom value=110
R46 "RMCF0603FT110R" MANUF_RES_0603 61.811,15.757 r135 bottom value=110
R47 "ERJ-3EKF5900V" MANUF_RES_0603 60.536,25.332 r0 bottom value=590
R48 "ERJ-3EKF5900V" MANUF_RES_0603 62.936,13.432 r45 bottom value=590
R50 "CRM1206-FX-R910ELF" RESC3116X06N 29.136,10.882 r270 top value="0.91 R"
U1 "TL974IPW" TSOP65P640X120-14N 64.502,21.976 r270 top
U2 "SHT41A-AD1B-R3" SHT41A-AD1B-R3-Footprint-1 10.087,15.583 r180 bottom
U3 "TL974IPW" TSOP65P640X120-14N 15.136,28.107 r0 top
U4 "LMV321WG-7" SOT95P285X130-5N 42.702,36.476 r90 top
U5 "TCA9509DGKR" TSOP65P490X110-8N 20.782,17.75 r0 bottom
U7 "ADS1115IDGSR" FP-DGS0010A-MFG 64.786,9.132 r180 top
U9 "PCA9615DPZ" TSSOP50P490X110-10N 67.361,19.882 r180 bottom
U10 "LD39200PU33R" FP-DFN6-7946637-MFG 18.611,25.857 r0 bottom
U11 "LMV321WG-7" SOT95P285X130-5N 42.777,44.251 r90 top

## Footprints (in the part's own frame and the unit in brackets; to place one, negate y for a bottom-side part, rotate by r counter-clockwise, add the part's x,y. Pads: shape width x height; smd on the part's side, far side on the other; paste and mask are expansions set on the pad)
0805 [mm]
  rrect50% 1x1.3 smd paste+0 mask+0: 1(-1,0) 2(1,0)
  silkscreen extent -0.12,-0.7 0.13,0.7, body extent -1,-0.63 1,0.63, height 0.65
09455511103-Footprint-1 [mm]
  rrect50% 2x2 hole 1 slot 1.5 at 90 deg: 0(-4.65,-6.14) 0(11,-6.14)
  round 3.7 hole 3.3: 0(-2.54,-8.89) 0(8.89,-8.89)
  oval 1.5x1.524 hole 0.9: 1(0,0) 2(-1.27,-2.54) 3(1.27,-2.54) 4(3.81,-2.54) 5(2.54,0) 6(5.08,0) 7(7.62,0) 8(6.35,-2.54)
  body extent -4.73,-12.78 11.17,0.52, height 16.35
DBZ0003A_M [mm] "SOT23, 3-Leads, Body 3.04x1.4mm, Pitch 0.95mm, IPC Low Density"
  rrect15% 1.2x0.65 smd: 1(-1.3,0.95) 2(-1.3,-0.95) 3(1.3,0)
  silkscreen extent -1.42,-1.5 0.7,1.95, body extent -1.26,-1.46 1.26,1.46, height 0.96
"fiducial 1mm-Footprint-1"#1 [mm]
  round 1.5 smd paste-1 mask+0.75: 0(0,0)
  SIG/PWR1 keep-out circle w0.58: c0,0 r1.25
"fiducial 1mm-Footprint-1"#2 [mm]
  round 1.5 smd paste-1 mask+1: 0(0,0)
  SIG/PWR1 keep-out circle w0.58: c0,0 r1.25
FP-CL21B106KOQNNNE-IPC_A [mm]
  rect 1.406x1.508 smd paste+0 mask+0: 1(-0.926,0) 2(0.926,0)
  silkscreen extent -1.63,-1.15 1.63,1.15, body extent -1.01,-0.62 0.99,0.63, height 1.4
FP-DFN6-7946637-MFG [mm]
  round 0.405 smd paste+0 mask+0: 1(-1.3,0.95) 2(-1.321,0) 3(-1.321,-0.95) 4(1.3,-0.95) 5(1.321,0) 6(1.321,0.95)
  rect 1.75x2.5 smd paste+0 mask+0: 7(0,0)
  SIG/PWR1 region: -1.905,1.175 -1.275,1.175 -1.189,1.158 -1.116,1.109 -1.067,1.036 -1.05,0.95 -1.05,0.95 -1.067,0.864 -1.116,0.791 -1.189,0.742 -1.275,0.725 -1.275,0.725 -1.905,0.725
  SIG/PWR1 region: -1.905,0.225 -1.275,0.225 -1.189,0.208 -1.116,0.159 -1.067,0.086 -1.05,0 -1.05,0 -1.067,-0.086 -1.116,-0.159 -1.189,-0.208 -1.275,-0.225 -1.275,-0.225 -1.905,-0.225
  SIG/PWR1 region: -1.905,-0.725 -1.275,-0.725 -1.189,-0.742 -1.116,-0.791 -1.067,-0.864 -1.05,-0.95 -1.05,-0.95 -1.067,-1.036 -1.116,-1.109 -1.189,-1.158 -1.275,-1.175 -1.275,-1.175 -1.905,-1.175
  SIG/PWR1 region: 1.905,-1.175 1.275,-1.175 1.189,-1.158 1.116,-1.109 1.067,-1.036 1.05,-0.95 1.05,-0.95 1.067,-0.864 1.116,-0.791 1.189,-0.742 1.275,-0.725 1.275,-0.725 1.905,-0.725
  SIG/PWR1 region: 1.905,-0.225 1.275,-0.225 1.189,-0.208 1.116,-0.159 1.067,-0.086 1.05,0 1.05,0 1.067,0.086 1.116,0.159 1.189,0.208 1.275,0.225 1.275,0.225 1.905,0.225
  SIG/PWR1 region: 1.905,0.725 1.275,0.725 1.189,0.742 1.116,0.791 1.067,0.864 1.05,0.95 1.05,0.95 1.067,1.036 1.116,1.109 1.189,1.158 1.275,1.175 1.275,1.175 1.905,1.175
  silkscreen extent -2.54,-1.75 1.55,1.75, body extent -1.51,-1.5 1.51,1.5, height 1
FP-DGS0010A-MFG [mm]
  rrect33% 1.45x0.3 smd paste+0 mask+0: 1(-2.2,1) 2(-2.2,0.5) 3(-2.2,0) 4(-2.2,-0.5) 5(-2.2,-1) 6(2.2,-1) 7(2.2,-0.5) 8(2.2,0) 9(2.2,0.5) 10(2.2,1)
  silkscreen extent -3.6,-1.55 1.05,1.55, body extent -3.03,-1.8 3.03,1.8, height 0.25
FP-GRM188-0_15-MFG [mm]
  rect 0.75x0.9 smd paste+0 mask+0: 1(-0.775,0) 2(0.775,0)
  body extent -1.25,-0.58 1.25,0.58, height 0.25
FP-PH1-01-UA-MFG [mm]
  oval 2x1.57 hole 1.02 paste-2539.97 mask+0: 1(0,0)
  silkscreen extent -1.46,-1.44 1.46,1.44, body extent -1.56,-1.54 1.56,1.54, height 0.25
INDC3225X06N [mm] "Chip Inductor, 2-Leads, Body 3.20x2.50mm, IPC Medium Density"
  rect 1.5x1.4 smd: 1(-1.778,0) 2(1.778,0)
  silkscreen extent -0.35,-1.26 0.35,1.26, body extent -1.85,-1.25 1.74,1.25, height 2.2
"IPC B 0603 RES" [mm]
  rect 0.859x0.912 smd paste+0 mask+0.1: 1(-0.777,0) 2(0.777,0)
  silkscreen extent -1.27,-0.76 1.14,0.76, body extent -1.46,-0.71 1.46,0.71, height 0.25
MANUF_CAP_0603 [mm]
  rect 0.8x0.9 smd paste+0 mask+0: 1(-0.75,0) 2(0.75,0)
  silkscreen extent -1.1,-0.7 1.1,0.7, body extent -1.35,-0.75 1.35,0.75, height 0.25
MANUF_RES_0603 [mm]
  rect 0.65x0.9 smd paste+0 mask+0: 1(-0.725,0) 2(0.725,0)
  silkscreen extent -0.85,-0.88 0.85,0.88, body extent -1.15,-0.58 1.15,0.58, height 0.25
NTCG103NH471JT1-Footprint-1 [mm]
  rect 0.45x0.5 smd paste+0 mask+0: 1(-0.425,0) 2(0.425,0)
  body extent -0.5,-0.25 0.5,0.25, height 0.55
ONSC-SOD-923-2-514AB-01_V [mm] "SOD, 2-Leads, Body 0.8x0.6mm"
  rect 0.36x0.25 smd: 1(-0.42,0) 2(0.42,0)
  silkscreen extent -0.47,0.48 -0.37,0.57, body extent -0.4,-0.3 0.4,0.3, height 0.4
RESC1608X55X25ML10T15 [mm] "Chip Resistor, 2-Leads, Body 1.70x0.90mm, IPC Low Density"
  rect 0.8x1 smd: 1(-0.75,0) 2(0.75,0)
  body extent -0.85,-0.45 0.85,0.45, height 0.55
RESC1608X55X30NL15T15 [mm] "Chip Resistor, 2-Leads, Body 1.60x0.80mm, IPC Medium Density"
  rect 0.8x0.95 smd: 1(-0.675,0) 2(0.675,0)
  body extent -0.87,-0.48 0.87,0.48, height 0.55
RESC1609X50X30NL08T20 [mm] "Chip Resistor, 2-Leads, Body 1.65x0.95mm, IPC Medium Density"
  rect 0.8x0.95 smd: 1(-0.65,0) 2(0.65,0)
  body extent -0.82,-0.48 0.82,0.48, height 0.5
RESC3116X06N [mm] "Chip Resistor, 2-Leads, Body 3.10x1.60mm, IPC Medium Density"
  rect 1.3x1.8 smd: 1(-1.7,0) 2(1.7,0)
  silkscreen extent -0.45,-0.77 0.45,0.77, body extent -1.63,-0.87 1.63,0.87, height 0.6
SHT41A-AD1B-R3-Footprint-1 [mm]
  rect 0.5x1.2 on Mech1 paste+0 mask+0.102: 0(0.225,0)
  rrect50% 0.6x0.45 smd: 1(-0.525,0.4) 2(-0.525,-0.4) 3(0.975,-0.4) 4(0.975,0.4)
  silkscreen extent -1.02,1 -0.97,1.05, body extent -0.52,-0.75 0.98,0.75, height 0.54
SOT95P237X110-3N [mm] "SOT23, 3-Leads, Body 2.90x2.37mm, Pitch 0.95mm, IPC Medium Density"
  rrect50% 1x0.6 smd: 1(-1.2,0.95) 2(1.2,0) 3(-1.2,-0.95)
  silkscreen extent -1.65,-1.5 0.7,2.03, body extent -1.32,-1.5 1.32,1.5, height 1.1
SOT95P285X130-5N [mm] "SOT23, 5-Leads, Body 3.00x2.85mm, Pitch 0.95mm, IPC Medium Density"
  rect 1.05x0.6 smd: 1(-1.375,0.95) 2(-1.375,0) 3(-1.375,-0.95) 4(1.375,-0.95) 5(1.375,0.95)
  silkscreen extent -1.5,-1.55 0.45,1.92, body extent -1.5,-1.55 1.5,1.55, height 1.3
TSOP65P490X110-8N [mm] "TSOP, 8-Leads, Body 3.00x3.00mm, Pitch 0.65mm, IPC Medium Density"
  rrect50% 1.45x0.45 smd mask+0: 1(-2.225,0.975) 2(-2.225,0.325) 3(-2.225,-0.325) 4(-2.225,-0.975) 5(2.225,-0.975) 6(2.225,-0.325) 7(2.225,0.325) 8(2.225,0.975)
  silkscreen extent -2.35,-1.55 1.15,1.9, body extent -2.45,-1.55 2.45,1.55, height 1.1
TSOP65P640X120-14N [mm] "TSOP, 14-Leads, Body 5.00x4.40mm, Pitch 0.65mm, IPC Medium Density"
  oval 1.6x0.35 smd mask+0: 1(-2.8,1.95) 2(-2.8,1.3) 3(-2.8,0.65) 4(-2.8,0) 5(-2.8,-0.65) 6(-2.8,-1.3) 7(-2.8,-1.95) 8(2.8,-1.95) 9(2.8,-1.3) 10(2.8,-0.65) 11(2.8,0) 12(2.8,0.65) 13(2.8,1.3) 14(2.8,1.95)
  silkscreen extent -3.07,-2.55 1.65,2.85, body extent -3.2,-2.55 3.2,2.55, height 1.2
TSSOP50P490X110-10N [mm] "TSSOP, 10-Leads, Body 3.00x3.00mm, Pitch 0.50mm, IPC Medium Density"
  rrect50% 1.35x0.3 smd mask+0: 1(-2.225,1) 2(-2.225,0.5) 3(-2.225,0) 4(-2.225,-0.5) 5(-2.225,-1) 6(2.225,-1) 7(2.225,-0.5) 8(2.225,0) 9(2.225,0.5) 10(2.225,1)
  silkscreen extent -2.35,-1.55 1.15,1.82, body extent -2.45,-1.55 2.45,1.55, height 1.1
TT7-10KC3-11-Footprint-1 [mm]
  oval 1x1.524 hole 0.55: 1(-1.25,0) 2(1.25,-0.009)
  body extent -2.1,-0.7 1.9,40.3, height 1
Vishay_CRCW0805-HPe3_MFG [mm]
  rect 0.95x1.45 smd paste+0 mask+0: 1(-0.975,0) 2(0.975,0)
  silkscreen extent -0.13,-0.7 0.13,0.7, body extent -1.55,-0.82 1.55,0.82, height 0.25

## Part data
3V3 5V 5VA AF1 AG DG NTC1 "OP (+)1" "OP (-)1" "OP OUT1": library part CMP-002-00083-1, "Conn Unshrouded Header HDR 1 POS 2.54mm Solder ST Thru-Hole Bag"
C1 C5 C17 C22: library part CMP-001-00098-2, "Ceramic Capacitor, Multilayer, Ceramic, 25V, 10% +Tol, 10% -Tol, X7R, 15% TC, 1uF, Surface Mount, 0603", Capacitor Type=Ceramic, Case/Package=0603, Max Operating Temperature=125°C, Min Operating Temperature=-55°C, Mounting Technology="Surface Mount", Pins=2, RoHS Compliant=Yes
C2 C4 C6 C8 C9 C10 C14 C15 C16 C18 C23 C24: library part CMP-001-00099-4, "Ceramic Capacitor, Multilayer, Ceramic, 16V, 10% +Tol, 10% -Tol, X7R, 15% TC, 0.1uF, Surface Mount, 0603", Capacitor Type=Ceramic, Case/Package=0603, Max Operating Temperature=125°C, Min Operating Temperature=-55°C, Mounting Technology="Surface Mount", Pins=2, RoHS Compliant=Yes
C3 C7 C21: library part CMP-001-00097-1, "Ceramic Capacitor, Multilayer, Ceramic, 10V, 20% +Tol, 20% -Tol, X5R, 15% TC, 10uF, Surface Mount, 0603", Capacitor Type=Ceramic, Case/Package=0603, Max Operating Temperature=85°C, Min Operating Temperature=-55°C, Mounting Technology="Surface Mount", Pins=2, RoHS Compliant=Yes
C19 C20: library part CMP-001-00101-1, "Ceramic Capacitor, Multilayer, Ceramic, 16V, 10% +Tol, 10% -Tol, X7R, 15% TC, 10uF, Surface Mount, 0805", Capacitor Type=Ceramic, Case/Package=0805, Max Operating Temperature=125°C, Min Operating Temperature=-55°C, Mounting Technology="Surface Mount", Pins=2, RoHS Compliant=Yes
D1: library part CMP-004-00033-2, "Two Terminal Voltage Reference, 1 Output, 4.096V, BIPolar, PDSO3", Case/Package=TSSOP, Max Operating Temperature=85°C, Min Operating Temperature=-40°C, Pins=3, RoHS Compliant=Yes
D2 D3 D4 D5 D6: library part CMP-004-00032-1, "Trans Voltage Suppressor Diode, 5V V(RWM), Bidirectional, 1 Element, Silicon", Max Operating Temperature=150°C, Min Operating Temperature=-55°C, Pins=2, RoHS Compliant=Yes
FM1 FM2 FM3 FM4 FM5 FM6: library part CMP-00030-00004-9, "fiducial marker 2D"
J1: library part CMP-002-00071-6, "Telecom and Datacom Connector, 8 Contact(s), Female, Straight, Solder Terminal, Locking, Jack", Max Operating Temperature=70°C, Min Operating Temperature=-40°C, Connector Type="TELECOM AND DATACOM CONNECTOR", Mounting Technology=Board, RoHS Compliant=Yes
L1: library part CMP-006-00022-2, "General Purpose Inductor, 2.2uH, 10%, 1 Element, Ferrite-Core, SMD, 1110", RoHS Compliant=Yes
Q2 Q3: library part CMP-013-00034-1, "Small Signal Bipolar Transistor, 1A I(C), 100V V(BR)CEO, 1-Element, NPN, Silicon", Frequency=150MHz, Max Operating Temperature=150°C, Pins=3, RoHS Compliant=Yes
R1 R4 R14 R15 R19 R22 R34 R35: library part CMP-009-00207-2, "Fixed Resistor, Metal Glaze/thick Film, 0.1W, 2000ohm, 75V, 1% +/-Tol, 100ppm/Cel, Surface Mount, 0603", Case/Package=0603, Max Operating Temperature=155°C, Min Operating Temperature=-55°C, Power=100mW, Tolerance=1%, Mounting Technology="Surface Mount", Pins=2, RoHS Compliant=Yes
R6 R24: library part CMP-009-00209-1, "Fixed Resistor, Metal Glaze/thick Film, 0.1W, 165000ohm, 75V, 1% +/-Tol, 100ppm/Cel, Surface Mount, 0603", Case/Package=0603, Max Operating Temperature=155°C, Min Operating Temperature=-55°C, Power=100mW, Tolerance=1%, Mounting Technology="Surface Mount", Pins=2, RoHS Compliant=Yes
R7 R25: library part CMP-009-00205-1, "Fixed Resistor, Metal Glaze/thick Film, 0.5W, 1ohm, 150V, 1% +/-Tol, 100ppm/Cel, Surface Mount, 0805", Case/Package=0805, Max Operating Temperature=155°C, Min Operating Temperature=-55°C, Power=500mW, Tolerance=1%, Mounting Technology="Surface Mount", Pins=2, RoHS Compliant=Yes
R8 R10 R11 R26 R32 R40: library part CMP-009-00204-2, "Fixed Resistor, Metal Glaze/thick Film, 0.1W, 10000ohm, 75V, 1% +/-Tol, 100ppm/Cel, Surface Mount, 0603", Case/Package=0603, Max Operating Temperature=155°C, Min Operating Temperature=-55°C, Power=100mW, Tolerance=1%, Mounting Technology="Surface Mount", Pins=2, RoHS Compliant=Yes
R9 R27: library part CMP-009-00192-3, "NTC Thermistor, 470ohm, Surface Mount", Max Operating Temperature=125°C, Min Operating Temperature=-40°C, Power=100mW, Tolerance=5%, Mounting Technology="Surface Mount", Pins=2, RoHS Compliant=Yes
R12 R31: library part CMP-009-00200-1, "Fixed Resistor, Metal Glaze/thick Film, 0.1W, 3600ohm, 75V, 1% +/-Tol, 100ppm/Cel, Surface Mount, 0603", Case/Package=0603, Max Operating Temperature=155°C, Min Operating Temperature=-55°C, Power=100mW, Tolerance=1%, Pins=2, RoHS Compliant=Yes
R13 R33: library part CMP-009-00208-1, "Fixed Resistor, Metal Glaze/thick Film, 0.1W, 75000ohm, 75V, 1% +/-Tol, 100ppm/Cel, Surface Mount, 0603", Case/Package=0603, Max Operating Temperature=155°C, Min Operating Temperature=-55°C, Power=100mW, Tolerance=1%, Mounting Technology="Surface Mount", Pins=2, RoHS Compliant=Yes
R16 R36: library part CMP-009-00212-1, "Fixed Resistor, Metal Glaze/thick Film, 0.1W, 280000ohm, 75V, 1% +/-Tol, 100ppm/Cel, Surface Mount, 0603", Case/Package=0603, Max Operating Temperature=155°C, Min Operating Temperature=-55°C, Power=100mW, Tolerance=1%, Mounting Technology="Surface Mount", Pins=2, RoHS Compliant=Yes
R28 R39: library part CMP-009-00191-2, "Fixed Resistor, Metal Glaze/thick Film, 0.125W, 5100ohm, 150V, 5% +/-Tol, 100ppm/Cel, Surface Mount, 0805", Case/Package=0805, Max Operating Temperature=155°C, Min Operating Temperature=-55°C, Power=125mW, Tolerance=5%, Mounting Technology="Surface Mount", Pins=2, RoHS Compliant=Yes
R29: library part CMP-009-00014-6, "Chip Resistor, 1 KOhm, +/-1%, 0.1 W, -55 to 155 degC, 0603 (1608 Metric)", Case/Package=0603, Max Operating Temperature=155°C, Min Operating Temperature=-55°C, Power=100mW, Tolerance=1%, Voltage Rating=50V, Mounting Technology=SM, Pins=2, RoHS Compliant=True
R30: library part CMP-009-00210-1, "Lead Frame Ntc 10K 1 Ohm B TT7 3977K", Case/Package="Through hole", Tolerance=1%
R41 R42: library part CMP-009-00006-8, "Chip Resistor, 0 Ohm, 0.1 W, -55 to 155 degC, 0603 (1608 Metric)", Case/Package=0603, Max Operating Temperature=155°C, Min Operating Temperature=-55°C, Power=100mW, Tolerance=5%, Voltage Rating=50V, Mounting Technology=SM, Pins=2, RoHS Compliant=True
R43 R44 R47 R48: library part CMP-009-00193-4, "Fixed Resistor, Metal Glaze/thick Film, 0.1W, 590ohm, 75V, 1% +/-Tol, 100ppm/Cel, Surface Mount, 0603", Case/Package=0603, Max Operating Temperature=155°C, Min Operating Temperature=-55°C, Power=100mW, Tolerance=1%, Mounting Technology="Surface Mount", Pins=2, RoHS Compliant=Yes
R45 R46: library part CMP-009-00194-4, "Fixed Resistor, Metal Glaze/thick Film, 0.1W, 110ohm, 75V, 1% +/-Tol, 100ppm/Cel, Surface Mount, 0603", Case/Package=0603, Max Operating Temperature=155°C, Min Operating Temperature=-55°C, Power=100mW, Tolerance=1%, Mounting Technology="Surface Mount", Pins=2, RoHS Compliant=Yes
R50: library part CMP-009-00211-1, "Fixed Resistor, Metal Glaze/thick Film, 0.5W, 0.91ohm, 0.675V, 1% +/-Tol, 100ppm/Cel, Surface Mount, 1206", Case/Package=1206, Max Operating Temperature=155°C, Min Operating Temperature=-55°C, Power=500mW, Tolerance=1%, Mounting Technology="Surface Mount", Pins=2, RoHS Compliant=Yes
U1 U3: library part CMP-014-00004-4, "Operational Amplifier, 4 Func, 6000uV Offset-Max, BIPolar, PDSO14", Case/Package=TSSOP, Max Operating Temperature=125°C, Min Operating Temperature=-40°C, Nominal Supply Voltage=2.5V, Channels=4, Pins=14, RoHS Compliant=Yes
U2: library part CMP-010-00024-1, "Board Mount Humidity Sensors 4th Gen Humidity and Temperature Sensor"
U4 U11: library part CMP-014-00005-1, "Operational Amplifier, 1 Func, 9000uV Offset-Max, CMOS, PDSO5", Case/Package=LSSOP, Max Operating Temperature=85°C, Min Operating Temperature=-40°C, Nominal Supply Voltage=2.7V, Channels=1, Pins=5, RoHS Compliant=Yes
U5: library part CMP-00024-00006-2, "Interface Circuit, PDSO8", Case/Package=TSSOP, Max Operating Temperature=85°C, Min Operating Temperature=-40°C, Pins=8, RoHS Compliant=Yes
U7: library part CMP-015-00008-1, "ADC, Delta-Sigma, 16-Bit, 1 Func, 4 Channel, Serial Access, PDSO10", Case/Package=TSSOP, Max Operating Temperature=125°C, Min Operating Temperature=-40°C, Nominal Supply Voltage=3.3V, Pins=10, RoHS Compliant=Yes
U9: library part CMP-00024-00007-3, "IC Redriver I2C 2CH 10TSSOP"
U10: library part CMP-019-00050-2, "Fixed Positive LDO Regulator, 3.3V, 0.25V Dropout", Case/Package=HVSON, Max Supply Voltage=6V, Pins=6, RoHS Compliant=Yes

## Via types
v1: diameter 0.6/0.6/0.6/0.6 (per signal layer), hole 0.2, SIG/PWR1 to SIG/PWR2, 22 vias
v2: diameter 0.6, hole 0.2, SIG/PWR1 to SIG/PWR2, 13 vias
v3: diameter 0.6/0.6/0.6/0.6 (per signal layer), hole 0.255, SIG/PWR1 to SIG/PWR2, 12 vias
v4: diameter 0.6, hole 0.255, SIG/PWR1 to SIG/PWR2, 1 vias

## Nets (pads, with @x,y where several pads share a name; then routed paths per layer and width w, separated by ;. In a path a pad name is that pad's centre, name@x,y a point inside that pad or via, vN(x,y) a via of type N, cw(c..) or ccw(c..) an arc to the next point about the centre after c; other vN are vias at no path point)
+3V3: 3V3.1 C2.2 C10.2 C20.2 R10.2 R11.2 U2.3 U5.1 U10.1 U10.2 | length 43.3
  SIG/PWR2 w0.153: U2.3 9.112,14.706 9.486,14.332 10.736,14.332 11.586,15.182 12.886,15.182 13.236,14.832 13.236,13.082 C2.2@12.536,12.382 ; C2.2 13.186,12.232 14.061,11.357 14.337,11.357 R11.2 ; C2.2@12.511,12.007 C2.2@12.561,12.057
  SIG/PWR2 w0.2: 14.311,19.682 19.586,19.682 20.086,19.182 20.086,14.324 19.969,14.207 C10.2@19.451,14.207 ; R11.2@14.337,11.332 18.586,11.332 19.286,12.032 C10.2 19.286,15.182 18.557,15.91 U5.1
  SIG/PWR2 w0.3: 3V3.1@4.223,18.444 5.298,18.444 6.611,19.757 14.236,19.757
  SIG/PWR2 w0.7: 3V3.1@3.936,18.957 3V3.1@3.973,18.994
+5V: 5V.1 C9.2 C15.2 C16.2 C17.2 C18.2 C19.2 D4.2 J1.3 J1.4 J1.6 R28.2 R39.2 R40.2 R43.2 R44.2 R50.1 U5.8 U9.1 U9.3 U9.10 U10.5 U10.6 | length 48.8
  SIG/PWR1 w0.2: D4.2 41.481,8.502 ; v2(57.036,24.357) 57.036,21.007 v2(58.536,19.507)
  SIG/PWR1 w0.5: R50.1@29.476,12.694 C17.2@33.774,12.694
  SIG/PWR2 w0.153: J1.6 J1.6@40.361,12.911 ; U9.10 C16.2@65.136,22.557 ; U9.3 69.636,19.832 71.111,19.832 72.286,21.007 72.286,22.182 71.951,22.517 71.426,22.517 C15.2@71.411,22.532 ; C15.2@70.961,22.607 C15.2@71.011,22.607
  SIG/PWR2 w0.2: C9.2 22.611,16.651 22.735,16.775 U5.8 ; J1.6@40.244,12.595 cw(c40.169,12.409) J1.6@40.246,12.594 ; R43.2@59.511,18.132 R43.2@59.536,18.157 ; 59.536,19.507 59.561,19.482 ; U9.1 70.786,20.882 71.411,21.507 71.411,22.532 C15.2
  SIG/PWR2 w0.228: v2(58.536,19.507) 59.536,19.507 ; R43.2@59.561,18.132 59.561,19.482 R44.2@59.561,20.382
  SIG/PWR2 w0.3: v2(57.036,24.357) 57.036,25.932 58.761,27.657 64.161,27.657 68.061,23.757 68.061,22.594 ; C16.2@65.173,22.594 68.061,22.594 ; C15.2@70.948,22.594 68.061,22.594
  SIG/PWR2 w0.7: C16.2@65.136,22.557 C16.2 C16.2@65.173,22.594
+5V_ANLG: 5VA.1 C4.2 C6.2 C8.2 C14.2 C21.2 C22.2 C23.2 C24.2 L1.2 Q2.2 Q3.2 R8.2 R13.2 R26.2 R29.2 R33.2 U1.4 U3.4 U4.5 U7.8 U11.5 | length 89.6
  SIG/PWR1 w0.153: 55.836,14.407 55.88,14.363 58.536,14.363 60.69,12.209 C14.2
  SIG/PWR1 w0.154: 5VA.1@25.986,20.382 5VA.1
  SIG/PWR1 w0.2: C8.2 7.836,24.032 8.261,24.457 11.236,24.457 10.111,25.582 10.111,27.582 10.636,28.107 U3.4 U3.4@12.307,28.078 ; 39.861,18.132 39.911,18.182 R29.2 39.911,36.207 40.186,36.482 40.186,37.882 ; U4.5 40.216,37.851 40.186,37.882 ; U11.5@41.774,45.679 41.774,45.904 41.627,46.051 41.241,46.051 40.336,46.957 C6.2 39.461,46.132 39.461,41.282 40.111,40.632 40.111,39.392 C24.2 40.186,39.317 40.186,37.882 ; C14.2@60.786,12.032 62.811,12.032 63.891,10.951 63.891,9.462 63.561,9.132 U7.8
  SIG/PWR1 w0.25: 63.661,28.932 63.611,28.882 C4.2 63.611,26.857 64.502,25.965 U1.4 ; R13.2 73.683,14.532
  SIG/PWR1 w0.3: C8.2 5.936,23.382 2.911,26.407 2.911,32.407 4.736,34.232 Q3.2 8.536,34.232
  SIG/PWR1 w0.5: C22.2 17.744,13.092 19.796,13.092 C23.2 ; C23.2@19.858,13.153 C21.2@21.975,13.153 ; C21.2@21.996,13.132 25.138,13.132 L1.2
AGND: AG.1 C4.1 C6.1 C8.1 C14.1 C21.1 C22.1 C23.1 C24.1 D1.2 R6.1 R9.2 R16.1 R24.1 R27.2 R32.1 R36.1 R41.1 R42.1 U1.11 U3.11 U4.2 U7.3 U11.2 | length 12.7
  SIG/PWR1 w0.153: R36.1 R36.1@14.088,32.155
  SIG/PWR1 w0.2: C4.1 C4.1@65.111,27.632 ; v3(70.057,24.207) 70.165,24.207 70.415,24.457 R6.1@72.813,24.457
  SIG/PWR1 w0.254: v3@2.701,75.075 v3(2.727,75.101)
  SIG/PWR1 w0.3: R27.2 v3@2.701,75.075
  SIG/PWR1 w0.5: R41.1 R42.1 ; C22.1@17.811,11.601 19.869,11.601 C21.1 ; R42.1@19.886,10.132 C23.1@19.886,11.584
  SIG/PWR1 w0.7: C23.1@19.869,11.601 C23.1@19.886,11.584
  SIG/PWR2 w0.254: v3@76.686,74.897 v3(76.714,74.925)
  SIG/PWR2 w0.3: R9.2 v3@76.686,74.897
  other v1: 20.126,27.739 14.876,30.814
  other v2: 57.511,13.182 12.003,21.473 17.661,22.582 11.753,23.298 6.211,27.482
  other v3: 71.881,18.045 41.986,25.557 68.561,25.832 43.261,32.807 41.211,36.432 43.168,41.104 43.386,48.357 39.661,50.082
AIRFLOW: AF1.1 R15.1 U7.5 | length 14.8
  SIG/PWR1 w0.2: R15.1@60.202,15.099 60.202,14.14 61.136,13.207 64.536,13.207 66.986,10.757 U7.5 67.036,10.082 71.736,10.082 AF1.1
AIRFLOW2: R35.1 U7.4 | length 95.8
  SIG/PWR1 w0.2: v2(13.736,20.832) 8.561,20.832 6.011,18.282 6.011,13.257 18.111,1.157 63.836,1.157 69.211,6.532 69.211,8.957 68.536,9.632 U7.4 ; v2(18.311,21.732) 18.419,21.732 18.607,21.92 R35.1@19.88,21.92
  SIG/PWR2 w0.2: v2(13.736,20.832) 13.786,20.782 17.361,20.782 v2(18.311,21.732)
DGND: C2.1 C9.1 C10.1 C15.1 C16.1 C17.1 C18.1 C19.1 C20.1 D2.1 D3.1 D4.1 D5.1 D6.1 DG.1 J1.5 R41.2 R42.2 R47.1 R48.1 U2.4 U5.4 U9.5 U10.3 | length 44.6
  SIG/PWR1 w0.2: C18.1 C18.1@32.112,11.258 ; v1(40.636,5.907) 40.641,5.912 D4.1
  SIG/PWR1 w0.5: v1(17.786,7.757) 17.786,7.784 17.736,7.834 R41.2 R42.2 ; C18.1@32.051,11.196 C17.1@34.133,11.196 ; C17.1@34.087,11.291 v1(35.264,11.291)
  SIG/PWR2 w0.153: U2.4 9.136,16.007 9.136,16.632 9.261,16.757 v1(9.886,16.757) ; D5.1 40.538,16.229 41.308,16.229 v1(41.311,16.232) ; J1.5 J1.5@42.875,12.653 ; v1(48.711,13.332) v1@48.755,13.376 ; D2.1@53.663,12.957 D2.1 ; v1(69.536,18.107) 69.536,18.832 U9.5
  SIG/PWR2 w0.2: v1(11.186,10.807) 12.286,10.807 C2.1 ; v1(15.636,18.732) 15.639,18.728 18.554,18.728 U5.4 ; v1(15.936,14.232) 17.761,14.232 C10.1 ; C9.1@22.615,13.861 C9.1 23.636,13.857 v1(24.061,14.282) ; C19.1 C19.1@23.735,27.207 ; D3.1@52.636,10.517 D3.1 D3.1@52.651,10.447 ; v1@54.371,10.447 v1(54.386,10.432) ; R47.1 59.816,25.337 59.816,25.964 60.258,26.407 v1(61.686,26.407) 62.786,26.407 65.111,24.082 C16.1 ; R48.1@62.37,12.866 R48.1@62.423,12.813 ; R48.1@62.494,12.949 R48.1@62.494,12.99 ; C15.1 71.361,25.273 71.561,25.473 v1(71.561,25.582)
  SIG/PWR2 w0.228: v1@48.755,13.376 D6.1 ; v1(52.636,12.957) D2.1@53.663,12.957 ; D3.1@52.651,10.447 v1@54.371,10.447 ; R48.1@62.423,12.813 63.43,12.813 v1(64.086,12.157)
  SIG/PWR2 w0.3: C20.1 13.882,28.41 15.686,28.41 ; U10.3 15.686,28.41 ; v1(17.511,31.932) 15.686,30.107 15.686,28.41
  SIG/PWR2 w0.4: C19.1@23.735,27.207 v1(25.261,27.207)
  SIG/PWR2 w0.6: J1.5@42.875,12.653 42.875,12.592 v3(43.661,11.807)
  other v1: 60.086,7.707 57.154,10.421
NetC1_1: "OP (-)1.1" C1.1 R1.1 R6.2 U1.2 | length 15.5
  SIG/PWR1 w0.2: U1.2 65.802,23.926 66.252,23.476 69.016,23.476 69.411,23.082 69.411,21.058 69.516,20.954 71.608,20.954 71.686,21.032 71.686,22.832 71.986,23.132 R6.2 74.226,23.132 75.361,24.267 75.361,24.482
NetC3_1: C3.1 R12.1 R14.1 U1.9 | length 7.4
  SIG/PWR1 w0.2: U1.9@63.226,19.152 U1.9 63.202,17.348 62.861,17.007 62.861,16.382 C3.1 64.286,16.257 64.545,15.997 65.044,15.997 65.98,15.061 65.98,15.034 66.309,14.705 R14.1@66.336,14.705
NetC3_2: C3.2 R12.2 R15.2 U1.8 | length 9.2
  SIG/PWR1 w0.2: R15.2 60.271,16.532 60.836,16.532 61.436,15.932 61.436,15.107 61.791,14.752 62.691,14.752 C3.2 64.236,14.707 R12.2 ; R15.2@60.219,16.67 60.219,17.265 62.13,19.176 U1.8
NetC5_1: C5.1 R19.1 R24.2 U3.2 | length 11.3
  SIG/PWR1 w0.2: 8.736,28.457 8.761,28.432 ; R24.2@8.738,27.483 R24.2 ; R19.1@8.766,25.75 R19.1@8.88,25.864
  SIG/PWR1 w0.3: C5.1@5.136,27.259 5.136,28.232 5.361,28.457 8.736,28.457 ; R19.1@8.738,26.007 8.738,26.12 R24.2@8.738,27.483 ; R24.2 8.761,28.432 9.736,29.407 U3.2
NetC7_1: C7.1 R31.1 R34.1 U3.9 | length 8.6
  SIG/PWR1 w0.2: U3.9 20.286,26.807 20.736,26.357 R31.1@21.861,26.357 ; C7.1 R31.1@21.861,26.357 ; R34.1@22.388,29.057 22.388,27.858 21.96,27.431 21.96,26.481 R31.1 R31.1@21.861,26.357
NetC7_2: C7.2 R31.2 R35.2 U3.8 | length 10.9
  SIG/PWR1 w0.2: U3.8 17.886,26.107 17.886,24.155 18.568,23.473 19.88,23.473 23.36,23.473 23.478,23.59 23.478,24.74 23.336,24.882 23.336,26.207 R31.2
NetD1_1: D1.1 R29.1 U4.1 | length 7
  SIG/PWR1 w0.153: R29.1 41.411,33.607 41.752,33.948 U4.1
  SIG/PWR1 w0.2: D1.1 R29.1 ; U4.1@41.711,35.06 U4.1
NetL1_1: L1.1 R50.2 | length 4.1
  SIG/PWR1 w0.5: L1.1 25.686,9.029 29.414,9.029 R50.2@29.511,8.932
"NetOP (+)1_1": "OP (+)1.1" R7.1 R8.1 R9.1 U1.3 | length 75.7
  SIG/PWR1 w0.3: U1.3@65.136,25.432 65.136,26.032 66.411,27.307 R8.1@68.32,27.307 ; U1.3@65.152,24.852 U1.3 ; U1.3@65.154,24.778 U1.3 ; 68.514,31.001 64.28,31.001 58.911,25.632 R7.1 59.591,23.376 64.902,23.376 65.152,23.626 U1.3
  SIG/PWR1 w0.4: 68.514,31.001 68.833,31.32 69.152,31.639 69.152,31.607
  SIG/PWR2 w0.3: 68.833,31.32 70.195,32.682 75.111,32.682 78.086,35.657 78.086,66.732 76.686,68.132 R9.1
"NetOP OUT1_1": "OP OUT1.1" R4.2 U1.1 | length 11.5
  SIG/PWR1 w0.2: U1.1 69.455,24.776 70.636,25.957 70.636,26.903 73.847,26.903 75.331,28.387 ; 75.511,28.206 75.891,27.826
NetQ2_1: Q2.1 R4.1 | length 11.1
  SIG/PWR1 w0.2: R4.1@70.636,28.457 R4.1@70.663,28.457
  SIG/PWR1 w0.3: R4.1@70.636,28.457 70.636,29.182 72.161,30.707 77.211,30.707 78.161,29.757 Q2.1
NetQ3_1: Q3.1 R22.1 | length 2.8
  SIG/PWR1 w0.3: Q3.1 5.086,30.732 5.862,29.956 6.437,29.956 R22.1
NetR13_1: R13.1 R16.2 U1.12 | length 10
  SIG/PWR1 w0.153: R16.2 69.959,16.632 R13.1@69.959,14.907
  SIG/PWR1 w0.2: U1.12@65.127,19.476 65.127,20.376 65.302,20.551 66.491,20.551 67.827,19.215 67.827,17.765 68.911,16.682 R16.2
NetR14_2: R14.2 U1.13 U1.14 | length 3.7
  SIG/PWR1 w0.2: U1.13 U1.14 66.452,16.449 R14.2@66.236,16.233
NetR22_2: R22.2 U3.1 | length 4.5
  SIG/PWR1 w0.3: R22.2@7.938,29.757 7.938,29.777 8.217,30.057 U3.1
NetR25_1: R25.1 R26.1 R27.1 U3.3 | length 79.5
  SIG/PWR1 w0.2: R26.1@12.936,24.457 14.261,24.457 14.311,24.407
  SIG/PWR1 w0.3: R27.1@2.682,73.306 R27.1 ; R27.1@2.703,73.301 2.703,67.5 4.336,65.867 4.336,36.132 1.536,33.332 1.536,24.807 4.036,22.307 14.311,22.307 ; U3.3 13.623,28.757 14.311,28.068 14.311,24.407 14.311,22.307 ; R25.1 17.461,18.482 14.311,21.632 14.311,22.307
NetR30_1: R30.1 R32.2 U11.1 | length 14.5
  SIG/PWR1 w0.2: U11.1 41.827,43.626 42.761,44.56 42.761,46.567 42.152,47.176 42.152,51.123 42.661,51.632 43.436,51.632 43.311,51.757 R30.1
NetR30_2: R30.2 U4.3 U4.4 | length 21.8
  SIG/PWR1 w0.153: v4@43.136,39.849 v4(43.136,39.832) 43.136,39.711 43.652,39.195 U4.4
  SIG/PWR1 w0.2: U4.3 U4.4
  SIG/PWR2 w0.2: R30.2 40.811,42.157 v4(43.136,39.832)
NetR33_1: R33.1 R36.2 U3.12 | length 12
  SIG/PWR1 w0.2: R33.1 11.461,32.182 12.988,33.708 R36.2 15.109,33.708 16.27,32.548 16.27,29.573 17.063,28.78 17.913,28.78 U3.12
NetR34_2: R34.2 U3.13 U3.14 | length 3.7
  SIG/PWR1 w0.2: U3.14 U3.13 19.286,29.407 19.615,29.077 20.814,29.077 R34.2@20.834,29.057
NetR40_1: R40.1 U5.5 | length 1.7
  SIG/PWR2 w0.153: R40.1@22.986,20.432 23.007,20.41 U5.5
NTC: NTC1.1 U7.6 U11.3 U11.4 | length 53.5
  SIG/PWR1 w0.154: v2(58.061,9.432) 58.092,9.463 58.092,9.963 58.261,10.132 U7.6
  SIG/PWR1 w0.2: NTC1.1 44.361,22.857 44.386,22.832 ; U11.4 U11.3 44.269,42.876 44.386,42.759 44.386,22.832 ; v2(53.461,9.457) 50.786,9.457 44.386,15.857 44.386,22.832
  SIG/PWR2 w0.154: v2(53.461,9.457) 53.473,9.444 58.048,9.444 v2(58.061,9.432)
RH: R10.1 U2.1 U5.3 | length 9.8
  SIG/PWR2 w0.153: U2.1 13.037,15.983 13.586,16.532 R10.1@13.586,18.075 ; R10.1 R10.1@13.586,18.075 ; U5.3 R10.1@13.586,18.075
SCL: R28.1 U5.7 U7.1 U7.10 U9.4 | length 73.2
  SIG/PWR1 w0.153: U7.10 U7.1
  SIG/PWR1 w0.2: v2(61.186,7.457) 61.262,7.533 61.412,7.533 62.011,8.132 U7.10
  SIG/PWR2 w0.153: U5.7 24.768,17.425 25.961,16.232 25.961,11.582 27.736,9.807 34.161,9.807 37.086,6.882 46.836,6.882 48.061,8.107 54.836,8.107 56.257,6.686 61.186,6.686 ; v2(61.186,7.457) 61.186,6.686 ; U9.4 70.536,19.382 70.88,19.037 70.88,12.98 64.586,6.686 61.186,6.686
  SIG/PWR2 w0.2: U5.7 U5.7@23.125,17.307
SCL_N: D3.2 J1.2 R46.1 R48.2 U9.6 | length 27
  SIG/PWR2 w0.228: J1.2 46.453,11.486 46.709,11.742 52.686,11.742 ; D3.2 52.636,11.692 52.686,11.742 ; R48.2@63.502,13.997 63.502,14.066 R46.1 62.235,15.156 61.937,15.156 61.805,15.287 61.616,15.287 ; U9.6 65.1,18.918 64.335,18.918 64.315,18.938 63.791,18.938 63.36,18.507 63.36,17.032 61.616,15.287 ; 52.686,11.742 58.071,11.742 61.616,15.287
SCL_P: D2.2 J1.1 R43.1 R46.2 U9.7 | length 28
  SIG/PWR2 w0.228: J1.1 45.183,12.641 46.027,11.797 46.216,11.797 46.549,12.13 54.536,12.13 ; D2.2 54.522,12.144 54.536,12.13 ; R43.1 61.036,16.937 61.352,16.621 61.352,16.323 61.21,16.181 61.21,15.882 61.342,15.751 61.342,15.562 ; U9.7 65.1,19.346 64.335,19.346 64.315,19.326 63.592,19.326 62.972,18.706 62.972,17.192 61.342,15.562 ; 54.536,12.13 57.91,12.13 61.342,15.562
SDA: R39.1 U5.6 U7.9 U9.2 | length 65.5
  SIG/PWR1 w0.2: v2(59.611,8.707) 59.648,8.669 62.548,8.669 U7.9
  SIG/PWR2 w0.153: U5.6 25.093,18.075 27.186,15.982 27.186,12.582 28.461,11.307 29.511,11.307 33.761,11.307 37.303,7.765 46.869,7.765 47.811,8.707 v2(59.611,8.707) 64.236,8.707 67.711,12.182 67.711,19.782 68.161,20.232
  SIG/PWR2 w0.2: 68.161,20.232 68.311,20.382 U9.2
SDA_N: D5.2 J1.7 R45.1 R47.2 U9.9 | length 43.1
  SIG/PWR2 w0.228: J1.7@37.563,12.665 J1.7 37.563,12.641 38.384,11.82 38.573,11.82 38.707,11.954 38.707,12.142 38.697,12.152 38.697,13.918 39.199,14.42 40.536,14.42 ; D5.2 40.536,14.42 ; R45.1 60.961,23.382 60.961,23.051 ; R45.1@61.311,23.732 R47.2@61.311,25.057 ; U9.9 64.063,20.382 63.424,21.02 63.424,22.667 63.041,23.051 60.961,23.051 ; 40.536,14.42 56.174,14.42 57.011,15.257 57.011,22.69 57.372,23.051 60.961,23.051
SDA_P: D6.2 J1.8 R44.1 R45.2 U9.8 | length 43.1
  SIG/PWR2 w0.228: J1.8 38.643,10.303 38.643,11.341 39.095,11.793 39.095,12.303 39.085,12.313 39.085,13.757 39.36,14.032 50.527,14.032 56.335,14.032 57.399,15.096 57.399,22.529 57.533,22.663 60.961,22.663 ; D6.2 50.447,13.896 50.527,13.976 ; R44.1@61.161,20.382 R45.2 60.961,22.332 60.961,22.663 ; U9.8 64.014,19.882 63.036,20.86 63.036,22.507 62.88,22.663 60.961,22.663
TEMP: R11.1 U2.2 U5.2 | length 12
  SIG/PWR2 w0.153: U2.2 10.667,15.183 11.066,15.582 14.036,15.582 ; R11.1 14.786,14.832 14.036,15.582 ; U5.2 15.879,17.425 14.036,15.582
V_Raw: C1.2 Q2.3 R1.2 R7.2 U1.10 | length 26.6
  SIG/PWR1 w0.3: R7.2@58.686,22.007 62.271,22.007 63.677,20.601 ; U1.10@63.846,19.182 63.846,20.432 63.677,20.601 ; C1.2@71.667,19.48 73.209,19.48 78.161,24.432 Q2.3 ; C1.2 69.436,19.532 R1.2 68.536,19.557 66.436,21.657 64.733,21.657 63.677,20.601
V_Raw2: C5.2 Q3.3 R19.2 R25.2 U3.10 | length 37.3
  SIG/PWR1 w0.2: Q3.3 Q3.3@6.986,32.032
  SIG/PWR1 w0.3: C5.2@5.107,26.007 4.048,27.066 4.048,32.043 4.936,32.932 6.086,32.932 Q3.3@6.986,32.032 ; C5.2 5.267,25.75 R19.2 ; Q3.3 8.136,31.832 9.061,30.907 13.111,30.907 16.561,27.457 ; U3.10 16.561,27.457 ; R25.2 20.186,19.707 19.386,20.507 17.911,20.507 15.786,22.632 15.786,26.682 16.561,27.457
pads on no net: D1.3 FM1.0 FM2.0 FM3.0 FM4.0 FM5.0 FM6.0 J1.0 U1.5 U1.6 U1.7 U2.0 U3.5 U3.6 U3.7 U7.2 U7.7 U10.4 U10.7

## Polygon pours and split planes (outlines as drawn)
AGND on SIG/PWR1 "AGND_L01_P011" (solid, remove dead copper, pour order 11): -0.708,78.151 81.976,78.151 81.976,0.032 0.542,0.032
+5V_ANLG on SIG/PWR1 "+5V_ANLG_L01_P004" (solid, remove dead copper, pour order 4): 72.375,28.626 73.461,27.54 73.461,6.532 73.386,6.457 73.461,6.382 80.636,6.382 80.636,16.782 82.461,18.607 81.976,19.091 81.976,35.379 67.453,35.379 54.529,27.976 54.529,16.576 46.476,16.576 46.476,18.632 37.479,18.632 37.479,15.379 30.376,15.379 28.979,16.776 28.979,28.151 16.301,35.379 7.929,35.379 7.929,32.501 14.727,32.501 24.127,27.379 24.127,15.972 17.036,15.972 17.036,12.226 36.511,12.226 36.511,4.437 36.511,0.032 54.33,0.032 54.33,12.301 61.527,19.498 61.527,27.379 62.774,28.626
+5V on SIG/PWR1 "+5V_L01_P003" (solid, remove dead copper, pour order 3): 40.771,13.757 41.427,13.101 41.427,11.826 44.786,10.882 44.786,8.107 35.936,8.107 35.936,10.411 27.936,10.411 27.936,13.757
DGND on SIG/PWR2 "DGND_L04_P013" (solid, remove dead copper, pour order 13): 89.398,77.549 87.642,75.793 87.642,-1.468 -5.747,-1.468 -11.283,4.068 -5.708,9.643 -5.708,78.463
+5V on SIG/PWR2 "+5V_L04_P005" (solid, remove dead copper, pour order 5): 21.536,20.461 19.311,22.686 19.311,26.379 28.476,26.379 28.476,20.302 28.476,16.176 31.241,16.176 38.531,8.886 40.102,8.874 40.102,11.051 39.227,11.926 39.227,13.301 49.258,23.332 71.361,23.332 73.686,21.007 73.686,0.032 31.711,0.032 21.536,10.207
+3V3 on SIG/PWR2 "+3V3_L04_P012" (solid, remove dead copper, pour order 12): 18.036,28.957 18.036,22.132 14.861,18.957 11.061,18.957 9.786,20.232 9.786,29.607 11.136,30.957 16.036,30.957
AGND on GND1 "AGND_L02_P008" (solid, pour order 8): -5.298,77.126 -5.548,76.876 -5.548,0.351 90.227,0.351 91.027,1.151 90.577,1.601 90.577,81.276
DGND on GND2 "DGND_L03_P009" (solid, pour order 9): 88.777,78.801 88.877,78.701 88.877,-0.749 -8.323,-0.749 -12.498,3.426 -12.498,77.826

## Other copper
SIG/PWR2:
  pour cut-out: 62.735,10.994 53.361,10.994 48.04,10.994 48.04,9.676 47.34,8.976 45.84,8.976 45.815,8.951 45.29,9.476 45.29,10.625 43.386,13.707 39.398,13.707 39.398,11.207 39.898,10.707 39.898,9.132 37.673,9.132 36.123,10.682 36.123,13.582 37.573,13.582 39.448,15.457 46.948,15.407 47.86,16.318 47.86,16.379 55.348,16.379 55.348,25.582 55.723,25.957 63.348,25.957 66.148,23.157 66.148,14.407

## Silkscreen, mask and mechanical layers (free items; w line width, h text height)
Bottom Overlay:
  lines w0.254: 2.551,24.582 13.476,24.582 ; 16.486,5.282 16.486,21.107
  text "Version B3 / Kimi Izzo / Date: 3/09/24" at 81.523,62.415 h1.52 r90
Top Solder:
  region: 18.836,25.782 18.836,30.382 17.011,30.382 17.011,25.782
  region: 13.236,25.857 13.236,30.357 11.461,30.357 11.461,25.857
  rectangle: 62.261,18.257 66.811,20.232
  rectangle: 62.211,23.857 66.811,25.707
Mechanical 1:
  lines w0.254: 34.025,0.037 34.025,13.339 49.926,13.339 49.926,0.037
Mechanical 16:
  lines w0.3: -0.024,22.379 ccw(c44.154,38.419) 17.036,0.032 65.504,0.032 76.466,10.994 76.466,20.579 cw(c77.466,20.579) 77.466,21.579 81.976,21.579 81.976,75.879 80.476,75.879 80.476,69.879 cw(c79.476,69.879) 79.476,68.879 78.476,68.879 cw(c78.476,69.879) 77.476,69.879 77.476,75.879 75.976,75.879 75.976,36.349 cw(c75.011,36.349) 75.011,35.384 68.976,35.379 55.476,27.379 55.476,16.379 cw(c54.476,16.379) 54.476,15.379 46.476,15.379 cw(c46.476,16.379) 45.476,16.379 45.476,57.379 38.476,57.379 38.476,16.379 cw(c37.476,16.379) 37.476,15.379 29.476,15.379 cw(c29.476,16.379) 28.476,16.379 28.476,27.379 14.976,35.379 8.976,35.379 cw(c8.976,36.379) 7.976,36.379 7.976,75.879 6.476,75.879 6.476,69.879 cw(c5.476,69.879) 5.476,68.879 4.476,68.879 cw(c4.476,69.879) 3.476,69.879 3.476,75.879 1.976,75.879 1.976,36.379 cw(c0.976,36.379) 0.976,35.379 -0.024,35.379 -0.024,22.379

## Text inside footprints (layer, text, board x,y; h text height)
J1: Bottom Overlay "1 5 6 7  / 2 3 4 8" at 53.561,1.857 h0.8 r270